# Altium PCB ee453_pcb_N-B-S.PcbDoc (part 1 of 2)
Units mil, origin at the board's own origin, x right, y up, seen from the top; angles counter-clockwise.
Board outline 6000 x 5000 mil, 4 copper layers (Power Layer, Signal layer, Ground layer, Extra signal layer), stack 53.912 mil thick; 97 components, 66 nets, 398 pads, 70 vias.
Unrouted connection lines stored in the file: 8.
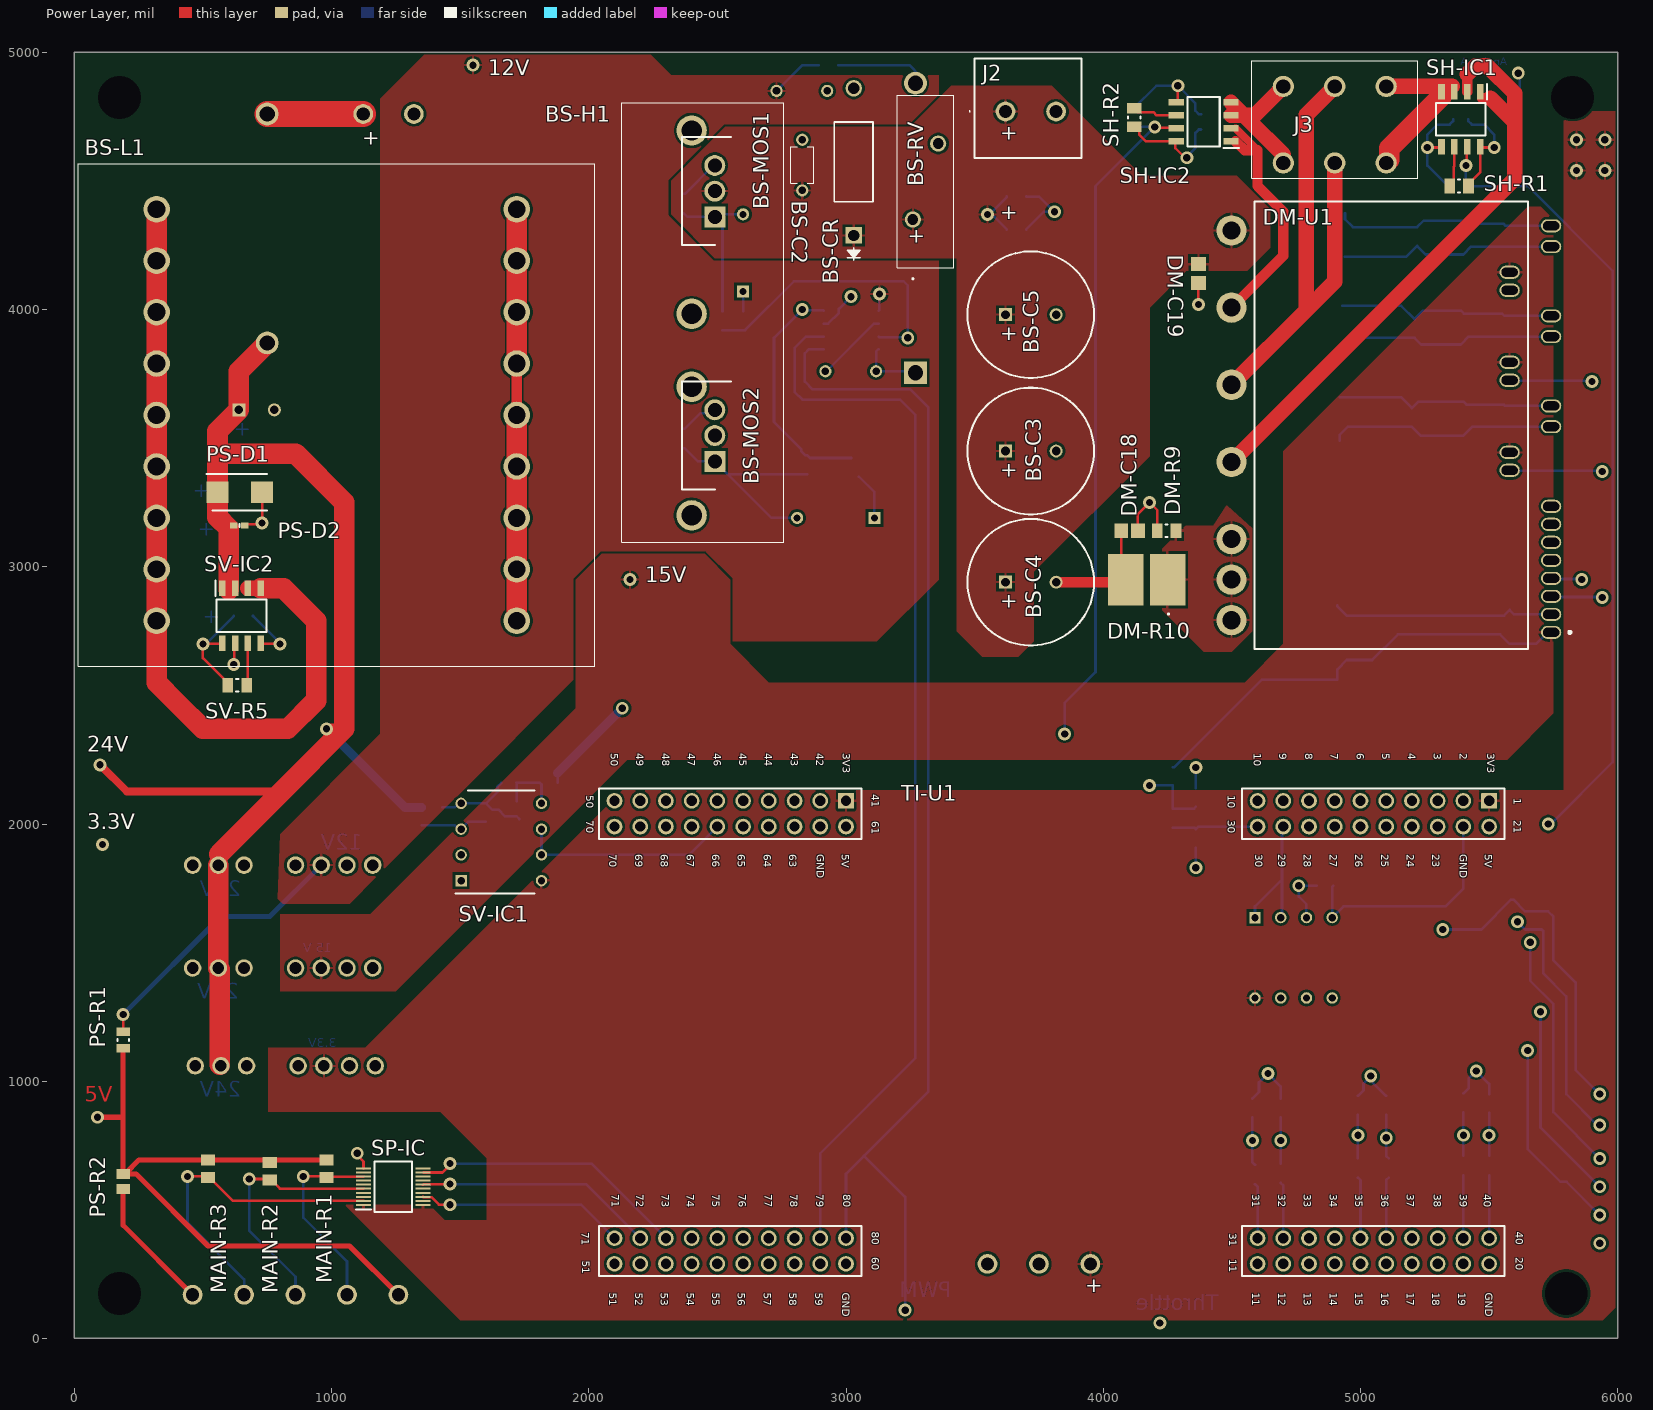
[diagram p0: Power Layer view]
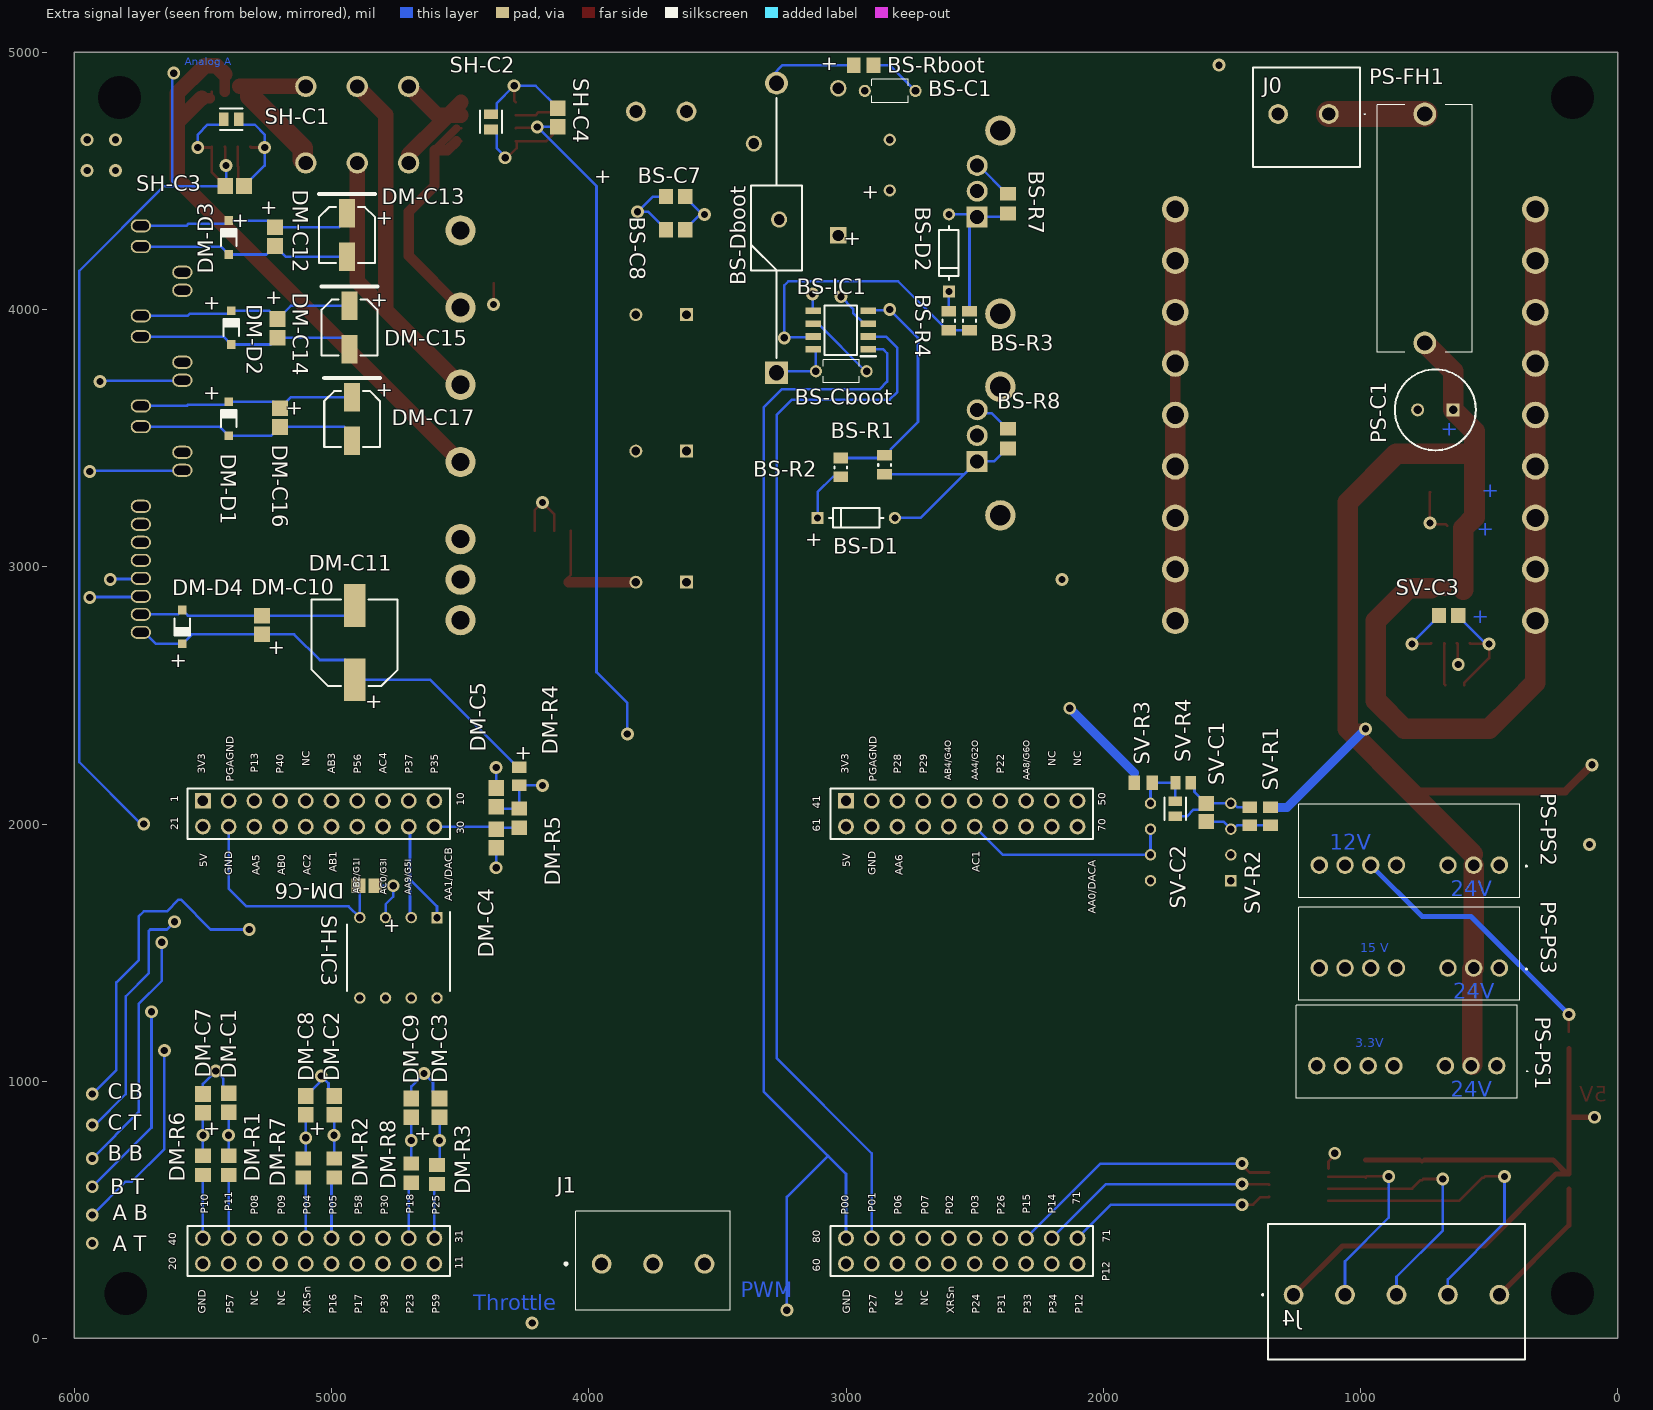
[diagram p1: Extra signal layer view, seen from below]
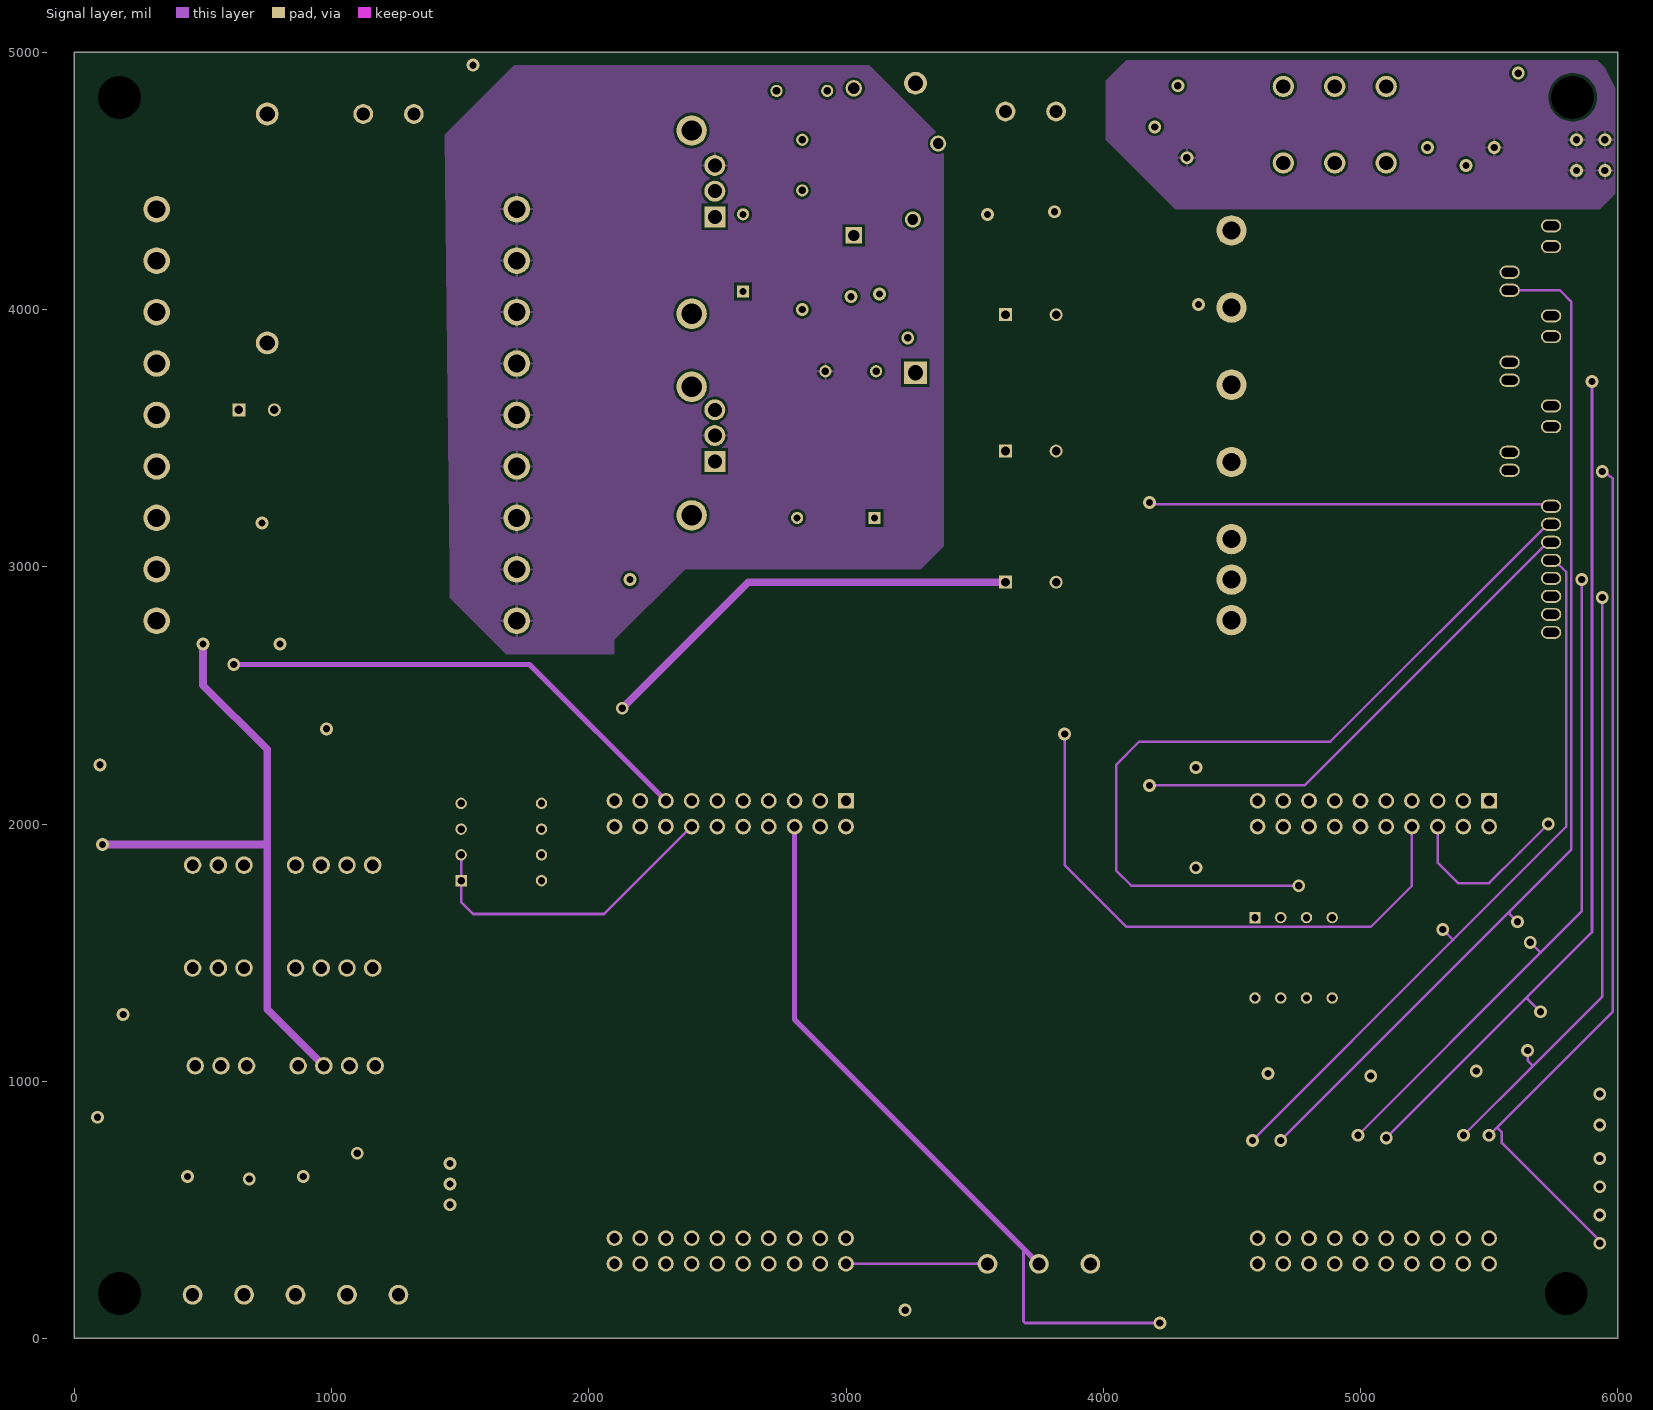
[diagram p2: Signal layer]
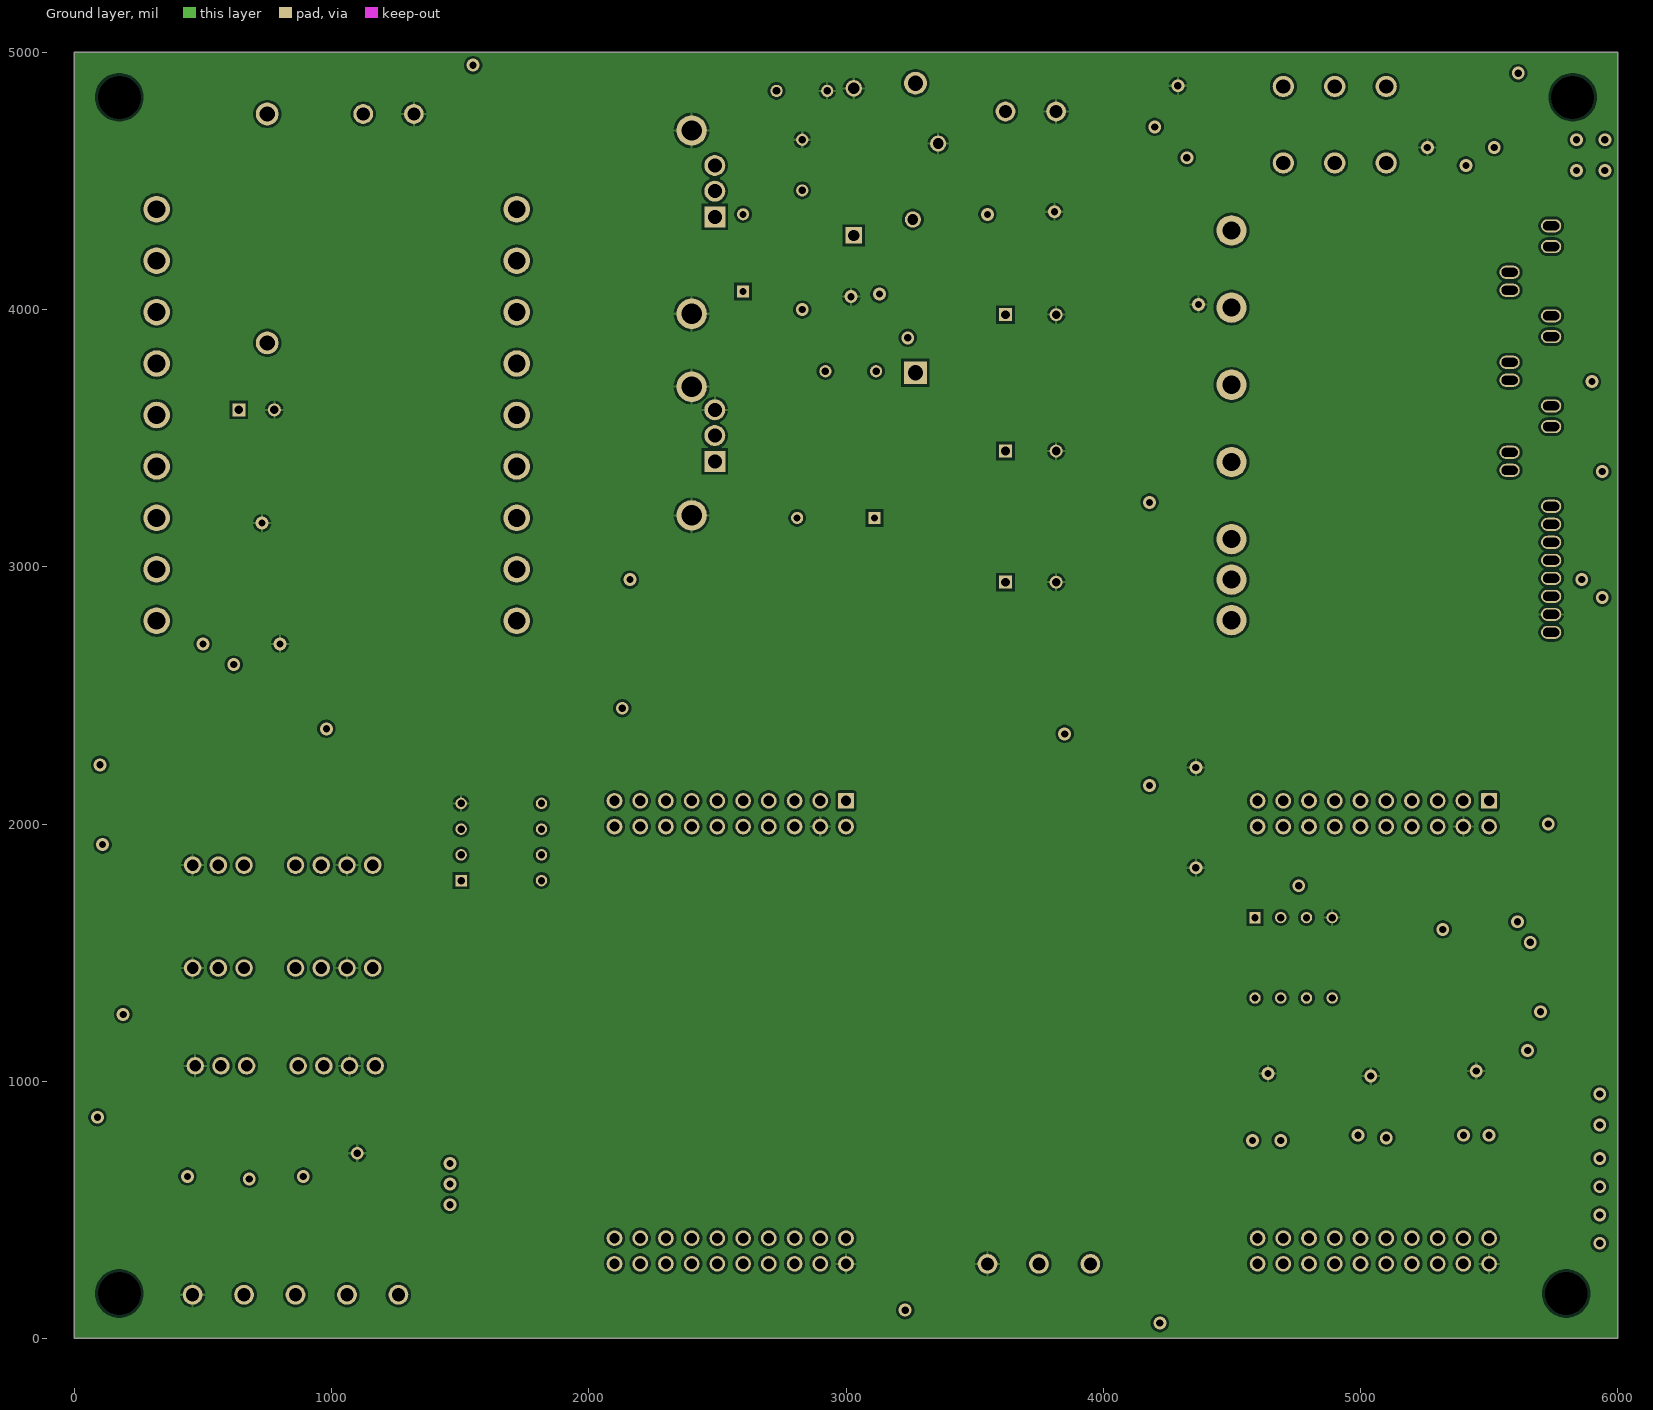
[diagram p3: Ground layer]

## Layer stack, top to bottom
Top Solder: solder mask 1, SM-001, Dk 4
Power Layer: signal copper 1.378
Dielectric 1: prepreg 5.1, PP-017, Dk 4.3
Dielectric 2: prepreg 5.1, PP-017, Dk 4.3
Signal layer: signal copper 1.378
Dielectric 3: core 28, Core-039, Dk 4.8
Ground layer: signal copper 1.378
Dielectric 4: prepreg 5.1, PP-017, Dk 4.3
Dielectric 5: prepreg 5.1, PP-017, Dk 4.3
Extra signal layer: signal copper 1.378
Bottom Solder: solder mask 1, SM-001, Dk 4

## Board outline
0,0 6000,0 6000,5000 0,5000

## Design rules (kind name [scope] priority, off if disabled: settings)
Clearance [All] p1: gap=5 ignorepadtopadclearanceinfootprint=FALSE except(0: SMDPad-Hole THPad-Hole Via-Hole Fill-Hole Poly-Hole Region-Hole Text-Hole; 10: THPad-THPad THPad-Via THPad-Fill THPad-Poly THPad-Region THPad-Text Via-Via Via-Fill Via-Poly Via-Region Via-Text Fill-Fill Fill-Poly Fill-Region Fill-Text Poly-Poly Poly-Region Poly-Text Region-Region Region-Text Text-Text)
Height [All] p1: minheight=0 maxheight=10000 prefheight=500
HoleSize [All] p1: absolutevalues=TRUE maxlimit=1000 minlimit=10 maxpercent=80.000 minpercent=20.000
MinimumSolderMaskSliver [All] p1: minsoldermaskwidth=5
PolygonConnect [All] p1: connectstyle=Relief reliefconductorwidth=10 reliefentries=4 polygonreliefangle="90 Angle" airgapwidth=10
RoutingVias [All] p1: holewidth=28 width=50 viastyle="Through Hole" minholewidth=28 minwidth=50 maxholewidth=1000 maxwidth=1000
SolderMaskExpansion [All] p1: expansion=4 istentingtop=FALSE
Width [All] p1: maxlimit=100 minlimit=10 preferedwidth=10
27 further rules are at their usual default settings.

## Classes and differential pairs
component class "TI Launchpad": TI-U1
component class PowerSupply: PS-C1 PS-D1 PS-D2 PS-FH1 PS-PS1 PS-PS2 PS-PS3 PS-R1 PS-R2
component class ee453_pcb_N-B-S: J0 J1 J2 J3 J4 MAIN-R1 MAIN-R2 MAIN-R3
component class "Drive Module": DM-C1 DM-C2 DM-C3 DM-C4 DM-C5 DM-C6 DM-C7 DM-C8 DM-C9 DM-C10 DM-C11 DM-C12 DM-C13 DM-C14 DM-C15 DM-C16 DM-C17 DM-C18 DM-C19 DM-D1 DM-D2 DM-D3 DM-D4 DM-R1 DM-R2 DM-R3 DM-R4 DM-R5 DM-R6 DM-R7 DM-R8 DM-R9 DM-R10 DM-U1
component class Designator: SH-C1 SH-C2 SH-C3 SH-C4 SH-IC1 SH-IC2 SH-IC3 SH-R1 SH-R2
component class "Boost Stage": 20 BS-C1 BS-C2 BS-C3 BS-C4 BS-C5 BS-C7 BS-C8 BS-Cboot BS-CR BS-D1 BS-D2 BS-Dboot BS-H1 BS-IC1 BS-IR2184 BS-L1 BS-MOS1 BS-MOS2 BS-R1 BS-R2 BS-R3 BS-R4 BS-R7 BS-R8 BS-Rboot BS-RV

## Components (designator, comment, footprint, x,y, rotation, side; value= is the part's Value field where it differs from the comment)
BS-C1 "K104K10X7RF5UH5" K104K10X7RF5UH5 2926.85,4850 r180 bottom
BS-C2 "K104K10X7RF5UH5" K104K10X7RF5UH5 2830,4660 r270 top
BS-C3 "EEUFS2A221" CAPPRD500W65D1250H2700 3620,3450 r0 top
BS-C4 "EEUFS2A221" CAPPRD500W65D1250H2700 3620,2940 r0 top
BS-C5 "EEUFS2A221" CAPPRD500W65D1250H2700 3620,3980 r0 top
BS-C7 "GRM21BR71H104KA01L" CAPC2013X135X45ML10T25 3662.6,4440 r180 bottom
BS-C8 "GRM21BR71H104KA01L" CAPC2013X135X45ML10T25 3662.6,4310 r180 bottom
BS-Cboot "K104K10X7RF5UH5" K104K10X7RF5UH5 2920,3760 r0 bottom
BS-CR "Part Number: P6KE91A" P6KESeries 3030,4860 r90 top value=Value
BS-D1 "1N4148" FP-017AG-MFG 2960.12,3190 r180 bottom
BS-D2 "1N4148" FP-017AG-MFG 2600,4220 r90 bottom
BS-Dboot "SB3H100-E3_54" DIOAD2855W132L835D505 3270,3754.02 r90 bottom
BS-H1 "WV-DT2-101E" WVDT2101E 2400,3200 r90 top
BS-IC1 "IRS2184SPBF" SOIC127P600X175-8N#1 3020,3920 r0 bottom
BS-L1 "B66366B1018T001" B66366B1018T001 1020,3590 r270 top
BS-MOS1 "IRFB4615PBF" TO254P483X1016X1994-3P 2490,4360 r90 top
BS-MOS2 "IRFB4615PBF" TO254P483X1016X1994-3P 2490,3410 r90 top
BS-R1 "CRCW08058R20JNEA" RESC2013X50X30NL20T20 2850,3396.42 r270 bottom
BS-R2 "CRCW080510R0FKEA" RESC2013X50X30NL20T20 3020,3386.42 r270 bottom
BS-R3 "CRCW08058R20JNEA" RESC2013X50X30NL20T20 2520,3956.42 r90 bottom
BS-R4 "CRCW080510R0FKEA" RESC2013X50X30NL20T20 2600,3956.42 r90 bottom
BS-R7 "ERJ-P06J103V" RESC2013X70X40ML20T20 2370,4411.61 r90 bottom
BS-R8 "ERJ-P06J103V" RESC2013X70X40ML20T20 2370,3498.39 r270 bottom
BS-Rboot "ERJ-P06J103V" RESC2013X70X40ML20T20 2931.61,4950 r180 bottom
BS-RV "V68ZS10P" V68ZS10P 3260,4350 r90 top
DM-C1 "08055C102KAT2A." CAPC2013X94X50ML20T25 5400,916.42 r270 bottom
DM-C2 "08055C102KAT2A." CAPC2013X94X50ML20T25 4990,906.42 r270 bottom
DM-C3 "08055C102KAT2A." CAPC2013X94X50ML20T25 4580,896.42 r270 bottom
DM-C4 "08055C102KAT2A." CAPC2013X94X50ML20T25 4360,1943.58 r90 bottom
DM-C5 "08055C102KAT2A." CAPC2013X94X50ML20T25 4360,2103.58 r270 bottom
DM-C6 "08055C103KAT-2A" CAPC2013X94X50NL20T25 4862.48,1760 r180 bottom
DM-C7 "08055C102KAT2A." CAPC2013X94X50ML20T25 5500,913.58 r270 bottom
DM-C8 "08055C102KAT2A." CAPC2013X94X50ML20T25 5100,906.42 r270 bottom
DM-C9 "08055C102KAT2A." CAPC2013X94X50ML20T25 4690,896.42 r270 bottom
DM-C10 "08051C104JAT2A" CAPC2013X94X50ML20T25 5270,2773.58 r270 bottom
DM-C11 "EEE-FK1E221P" PNSC-EEE-FK1E221P_N 4910,2704.68 r90 bottom
DM-C12 "08051C104JAT2A" CAPC2013X94X50ML20T25 5220,4283.58 r90 bottom
DM-C13 "EEEFP1E220AR" PNSC-FP-V-C_V 4940,4290 r270 bottom
DM-C14 "08051C104JAT2A" CAPC2013X94X50ML20T25 5210,3926.42 r90 bottom
DM-C15 "EEEFP1E220AR" PNSC-FP-V-C_V 4930,3930 r270 bottom
DM-C16 "08051C104JAT2A" CAPC2013X94X50ML20T25 5200,3580 r90 bottom
DM-C17 "EEEFP1E220AR" PNSC-FP-V-C_V 4920,3574.65 r270 bottom
DM-C18 "08055C103KAT-2A" CAPC2013X94X50NL20T25 4102.48,3140 r0 top
DM-C19 "GRM21BR71H104KA01L" CAPC2013X135X45ML10T25 4370,4140 r270 top
DM-D1 "MMSZ5245B-E3-08" VISH-SOD-123-2_V 5400,3575.94 r90 bottom
DM-D2 "MMSZ5245B-E3-08" VISH-SOD-123-2_V 5390,3930 r90 bottom
DM-D3 "MMSZ5245B-E3-08" VISH-SOD-123-2_V 5400,4280 r90 bottom
DM-D4 "MMSZ5245B-E3-08" VISH-SOD-123-2_V 5580,2765.94 r270 bottom
DM-R1 "ERA6AEB101V" RESC2013X60X40ML20T25 5400,672.6 r90 bottom
DM-R2 "ERA6AEB101V" RESC2013X60X40ML20T25 4990,662.6 r90 bottom
DM-R3 "ERA6AEB101V" RESC2013X60X40ML20T25 4590,637.4 r90 bottom
DM-R4 "ERJ-6ENF4701V" RESC2013X70X40NL20T20 4270,2185.55 r270 bottom
DM-R5 "ERA6AEB101V" RESC2013X60X40ML20T25 4270,2022.6 r90 bottom
DM-R6 "ERA6AEB101V" RESC2013X60X40ML20T25 5500,672.6 r90 bottom
DM-R7 "ERA6AEB101V" RESC2013X60X40ML20T25 5110,662.6 r90 bottom
DM-R8 "ERA6AEB101V" RESC2013X60X40ML20T25 4690,642.6 r90 bottom
DM-R9 "CRCW0805200RFKEA" RESC2013X50X30NL20T20 4246.42,3140 r180 top
DM-R10 "WSHM2818R0330FEB" WSHM2818R0330FEB 4169.09,2950 r180 top
DM-U1 "FNB34060T" FNB34060T 5120,3550 r270 top
J0 "1985881" 1985881 1123.15,4760 r0 bottom
J1 "1985917" 1985917 3950,290 r180 bottom
J2 "1985881" 1985881 3620,4770 r0 top
J3 "1730515" 1730515 5100,4867.24 r180 top
J4 "1733606" 1733606 1260,170 r180 bottom
MAIN-R1 "CRCW080510K0FKEAHP" RESC2013X60X40NL15T20 980,660 r90 top
MAIN-R2 "CRCW080510K0FKEAHP" RESC2013X60X40NL15T20 760,650 r90 top
MAIN-R3 "CRCW080510K0FKEAHP" RESC2013X60X40NL15T20 520,660 r90 top
PS-C1 "EEU-FS2A470" CAPPRD350W65D800H1650 640,3610 r0 bottom
PS-D1 "SMBJ28A" DIOM5436X261N 643.39,3290 r0 top
PS-D2 "EZA-EG2A50AX" DIONC1005X43N 641.65,3160 r0 top
PS-FH1 "0PTF0078P" 0PTF0078P 750,4315.12 r270 bottom
PS-PS1 "RS3-243.3S" RS32433S 470,1060 r0 bottom
PS-PS2 "RS3-2412S" RS32415S 460,1840 r0 bottom
PS-PS3 "RS3-2415S" RS32415S 460,1440 r0 bottom
PS-R1 "CRCW0805210KFKEA" RESC2013X50X30LL20T20 190,1160 r90 top
PS-R2 "ERA6AEB154V" RESC2013X60X40LL20T25 190,610 r90 top
SH-C1 "C0805C104K5RACTU" FP-C0805C-DN-MFG 5389.53,4740 r180 bottom value="0.10 μF"
SH-C2 "C0805C104K5RACTU" FP-C0805C-DN-MFG 4380,4729.53 r90 bottom value="0.10 μF"
SH-C3 "08055C102KAT2A." CAPC2013X94X50ML20T25 5376.42,4480 r0 bottom
SH-C4 "08055C102KAT2A." CAPC2013X94X50ML20T25 4120,4746.42 r270 bottom
SH-IC1 "ACS711ELCTR-12AB-T" SOIC127P600X175-8N#1 5390,4740 r270 top
SH-IC2 "ACS711ELCTR-12AB-T" SOIC127P600X175-8N#1 4390,4730 r180 top
SH-IC3 "LMC6482IN_NOPB" DIP794W53P254L959H508Q8N#1 4740,1480 r270 bottom
SH-R1 "CRCW08051K00FKEA" RESC2013X50X30NL20T20 5383.58,4480 r180 top
SH-R2 "CRCW08051K00FKEA" RESC2013X50X30NL20T20 4120,4746.42 r90 top
SP-IC "SN74LVC245ADGVR" SOP40P640X120-20N 1240,590 r0 top
SV-C1 "08052A151JAT2A" CAPC2013X140X50ML20T25 1600,2044.57 r270 bottom
SV-C2 "C0805C101J1GACTU" FP-C0805C-DN-MFG 1720,2059.53 r270 bottom value="100 pF"
SV-C3 "GRM21BR71H104KA01L" CAPC2013X135X45ML10T25 657.4,2810 r180 bottom
SV-IC1 "LMC6482IN_NOPB" DIP794W53P254L959H508Q8N#2 1660,1930 r0 top
SV-IC2 "ACS711ELCTR-12AB-T" SOIC127P600X175-8N#2 650,2810 r270 top
SV-R1 "ERJ-6ENF2103V" RESC2013X70X40NL20T20 1350,2030 r90 bottom
SV-R2 "ERJ-6ENF2612V" RESC2013X70X40NL20T20 1430,2030 r270 bottom
SV-R3 "ERJ-6ENF3093V" RESC2013X70X40NL20T20 1844.45,2160 r0 bottom
SV-R4 "ERA6AEB183V" RESC2013X60X40LL20T25 1689.53,2160 r0 bottom
SV-R5 "CRCW08051K00FKEA" RESC2013X50X30NL20T20 633.58,2540 r180 top
TI-U1 "C2000" C2000 3800,1190 r0 top

## Footprints (in the part's own frame and the unit in brackets; to place one, negate y for a bottom-side part, rotate by r counter-clockwise, add the part's x,y. Pads: shape width x height; smd on the part's side, far side on the other; paste and mask are expansions set on the pad)
0PTF0078P [mm]
  round 2.25 hole 1.5: 1(-11.3,0) 2(11.3,0)
  silkscreen extent -12.2,-4.7 12.2,4.7, body extent -12.2,-4.7 12.2,4.7, height 11.6
1730515 [mm]
  round 2.1 hole 1.4: 1(0,0) 2(0,7.55) 3(5.08,0) 4(5.08,7.55) 5(10.16,0) 6(10.16,7.55)
  silkscreen extent -3.13,-2.55 13.29,9.07, body extent -3.13,-2.55 13.29,9.07, height 18.1
1733606 [mm]
  round 1.95 hole 1.3: 1(0,0) 2(5.08,0) 3(10.16,0) 4(15.24,0) 5(20.32,0)
  silkscreen extent -3.1,-6.4 22.86,7, body extent -2.54,-7 22.86,6.4, height 15.55
1985881 [mm]
  round 1.95 hole 1.3: 1(0,0) 2(5,0)
  silkscreen extent -3.6,-4.6 7.5,5.25, body extent -3.07,-4.6 7.5,5.25, height 14
1985917 [mm]
  round 1.95 hole 1.3: 1(0,0) 2(5.08,0) 3(10.16,0)
  silkscreen extent -3.62,-4.6 12.7,5.2, body extent -2.54,-4.6 12.7,5.2, height 14.05
B66366B1018T001 [mm]
  round 2.625 hole 1.75: 1(-20.32,-17.78) 2(-15.24,-17.78) 3(-10.16,-17.78) 4(-5.08,-17.78) 5(0,-17.78) 6(5.08,-17.78) 7(10.16,-17.78) 8(15.24,-17.78) 9(20.32,-17.78) 10(20.32,17.78) 11(15.24,17.78) 12(10.16,17.78) 13(5.08,17.78) 14(0,17.78) 15(-5.08,17.78) 16(-10.16,17.78) 17(-15.24,17.78) 18(-20.32,17.78)
  silkscreen extent -24.8,-25.5 24.8,25.5, body extent -24.8,-25.5 24.8,25.5, height 38.5
C2000 [mm]
  rrect6% 1.55x1.55 hole 1.02: 1(43.18,22.86) 41(-20.32,22.86)
  round 1.55 hole 1.02: 2(40.64,22.86) 3(38.1,22.86) 4(35.56,22.86) 5(33.02,22.86) 6(30.48,22.86) 7(27.94,22.86) 8(25.4,22.86) 9(22.86,22.86) 10(20.32,22.86) 11(20.32,-22.86) 12(22.86,-22.86) 13(25.4,-22.86) 14(27.94,-22.86) 15(30.48,-22.86) 16(33.02,-22.86) 17(35.56,-22.86) 18(38.1,-22.86) 19(40.64,-22.86) 20(43.18,-22.86) 21(43.18,20.32) 22(40.64,20.32) 23(38.1,20.32) 24(35.56,20.32) 25(33.02,20.32) 26(30.48,20.32) 27(27.94,20.32) 28(25.4,20.32) 29(22.86,20.32) 30(20.32,20.32) 31(20.32,-20.32) 32(22.86,-20.32) 33(25.4,-20.32) 34(27.94,-20.32) 35(30.48,-20.32) 36(33.02,-20.32) 37(35.56,-20.32) 38(38.1,-20.32) 39(40.64,-20.32) 40(43.18,-20.32) 42(-22.86,22.86) 43(-25.4,22.86) 44(-27.94,22.86) 45(-30.48,22.86) 46(-33.02,22.86) 47(-35.56,22.86) 48(-38.1,22.86) 49(-40.64,22.86) 50(-43.18,22.86) 51(-43.18,-22.86) 52(-40.64,-22.86) 53(-38.1,-22.86) 54(-35.56,-22.86) 55(-33.02,-22.86) 56(-30.48,-22.86) 57(-27.94,-22.86) 58(-25.4,-22.86) 59(-22.86,-22.86) 60(-20.32,-22.86) 61(-20.32,20.32) 62(-22.86,20.32) 63(-25.4,20.32) 64(-27.94,20.32) 65(-30.48,20.32) 66(-33.02,20.32) 67(-35.56,20.32) 68(-38.1,20.32) 69(-40.64,20.32) 70(-43.18,20.32) 71(-43.18,-20.32) 72(-40.64,-20.32) 73(-38.1,-20.32) 74(-35.56,-20.32) 75(-33.02,-20.32) 76(-30.48,-20.32) 77(-27.94,-20.32) 78(-25.4,-20.32) 79(-22.86,-20.32) 80(-20.32,-20.32)
  silkscreen extent -44.7,-24.07 44.7,24.07, body extent -44.7,-24.07 44.7,24.07, height 8.51
CAPC2013X94X50ML20T25 [mm] "Chip Capacitor, 2-Leads, Body 2.01x1.25mm, IPC Low Density"
  rect 1.55x1.55 smd: 1(-0.925,0) 2(0.925,0)
  body extent -1.1,-0.72 1.11,0.72, height 0.94
CAPC2013X94X50NL20T25 [mm] "Chip Capacitor, 2-Leads, Body 2.01x1.25mm, IPC Medium Density"
  rect 1.35x1.45 smd: 1(-0.825,0) 2(0.825,0)
  body extent -1.1,-0.72 1.11,0.72, height 0.94
CAPC2013X135X45ML10T25 [mm] "Chip Capacitor, 2-Leads, Body 2.10x1.35mm, IPC Low Density"
  rect 1.4x1.5 smd: 1(-0.95,0) 2(0.95,0)
  body extent -1.05,-0.67 1.05,0.67, height 1.35
CAPC2013X140X50ML20T25 [mm] "Chip Capacitor, 2-Leads, Body 2.00x1.25mm, IPC Low Density"
  rect 1.5x1.55 smd: 1(-0.9,0) 2(0.9,0)
  body extent -1.1,-0.72 1.1,0.72, height 1.4
CAPPRD350W65D800H1650 [mm]
  rect 1.275x1.275 hole 0.85: 1(0,0)
  round 1.275 hole 0.85: 2(3.5,0)
  silkscreen extent -2.25,-4 5.75,4, body extent -2.5,-4.25 6,4.25, height 16.5
CAPPRD500W65D1250H2700 [mm]
  rect 1.275x1.275 hole 0.85: 1(0,0)
  round 1.275 hole 0.85: 2(5,0)
  silkscreen extent -3.75,-6.25 8.75,6.25, body extent -4,-6.5 9,6.5, height 27
DIOAD2855W132L835D505 [mm]
  rect 2.25x2.25 hole 1.5: 1(0,0)
  round 2.25 hole 1.5: 2(28.6,0)
  silkscreen extent 1.48,-2.52 27.13,2.52, body extent -0.65,-2.65 29.21,2.65, height 5.3
DIOM5436X261N [mm]
  rect 2.2x2.15 smd: 1(-2.2,0) 2(2.2,0)
  silkscreen extent -3.27,-1.81 2.7,1.81, body extent -2.7,-1.81 2.7,1.81, height 2.61
DIONC1005X43N [mm]
  rect 0.75x0.6 smd: 1(-0.55,0) 2(0.55,0)
  silkscreen extent 0,-0.15 0,0.15, body extent -0.5,-0.25 0.5,0.25, height 0.43
DIP794W53P254L959H508Q8N#1 [mm]
  rect 1.13x1.13 hole 0.73: 1(-3.97,3.81)
  round 1.13 hole 0.73: 2(-3.97,1.27) 3(-3.97,-1.27) 4(-3.97,-3.81) 5(3.97,-3.81) 6(3.97,-1.27) 7(3.97,1.27) 8(3.97,3.81)
  silkscreen extent -4.53,-5.08 3.3,5.08, body extent -4.1,-4.8 4.1,4.79, height 5.08
DIP794W53P254L959H508Q8N#2 [mm]
  rect 1.13x1.13 hole 0.73: 1(-3.97,-3.81)
  round 1.13 hole 0.73: 2(-3.97,-1.27) 3(-3.97,1.27) 4(-3.97,3.81) 5(3.97,3.81) 6(3.97,1.27) 7(3.97,-1.27) 8(3.97,-3.81)
  silkscreen extent -4.53,-5.08 3.3,5.08, body extent -4.1,-4.8 4.1,4.8, height 5.08
FNB34060T [mm]
  oval 1.3x2 hole 1.6 slot 0.9 at 0 deg paste-1000 mask+0: 1(20.447,15.78) 2(18.669,15.78) 3(16.891,15.78) 4(15.113,15.78) 5(13.335,15.78) 6(11.557,15.78) 7(9.779,15.78) 8(8.001,15.78) 9(4.445,11.68) 10(2.667,11.68) 11(0.136,15.78) 12(-1.914,15.78) 13(-4.445,11.68) 14(-6.223,11.68) 15(-8.754,15.78) 16(-10.804,15.78) 17(-13.335,11.68) 18(-15.113,11.68) 19(-17.644,15.78) 20(-19.694,15.78)
  round 3 hole 1.8 paste-1000 mask+0: 21(19.24,-15.78) 22(15.24,-15.78) 23(11.24,-15.78) 24(3.62,-15.78) 25(-4,-15.78) 26(-11.62,-15.78) 27(-19.24,-15.78)
  silkscreen extent -22.1,-13.5 22.1,17.76, body extent -21.96,-16.1 21.97,16.38, height 5.61
FP-017AG-MFG [mm]
  rect 1.2x1.2 hole 0.7 paste-1000 mask+0: 1(-3.813,0)
  round 1.2 hole 0.7 paste-1000 mask+0: 2(3.813,0)
  silkscreen extent -2.68,-0.95 2.68,0.95, body extent -4.06,-0.95 4.06,0.95, height 1.91
FP-C0805C-DN-MFG [mm]
  rect 0.95x1.35 smd paste+0 mask+0: 1(-0.75,0) 2(0.75,0)
  silkscreen extent -1.1,-1.07 1.1,1.07, body extent -1,-0.63 1,0.62, height 0.88
K104K10X7RF5UH5 [mm]
  round 1.2 hole 0.75: 1(0,0) 2(5,0)
  silkscreen extent 0.7,-1.15 4.3,1.15, body extent -0.27,-1.15 5.28,1.15, height 6.3
P6KESeries [mil]
  rect 64x64 hole 44: 1(-572,0)
  round 64 hole 44: 2(0,0)
  silkscreen extent -669,-75 -131,75, body extent 0,0 10,10, height 10
PNSC-EEE-FK1E221P_N [mm] "CAPAE, 2-Leads, Body 8.5x8.5mm, IPC Medium Density"
  rect 4.2x2.1 smd: 1(-3.675,0) 2(3.675,0)
  silkscreen extent -4.25,-4.25 4.25,4.25, body extent -5,-4.25 5,4.25, height 10.5
PNSC-FP-V-C_V [mm] "CAPAE, 2-Leads, Body 5.50x5.50mm"
  rect 2.8x1.6 smd: 1(-2.15,0) 2(2.15,0)
  silkscreen extent -4.05,-2.75 2.75,2.75, body extent -3.25,-2.75 3.25,2.75, height 6.1
RESC2013X50X30LL20T20 [mm] "Chip Resistor, 2-Leads, Body 2.00x1.25mm, IPC High Density"
  rect 0.85x1.35 smd: 1(-0.825,0) 2(0.825,0)
  silkscreen extent -0.1,-0.58 0.1,0.58, body extent -1.1,-0.72 1.1,0.72, height 0.5
RESC2013X50X30NL20T20 [mm] "Chip Resistor, 2-Leads, Body 2.00x1.25mm, IPC Medium Density"
  rect 1.05x1.45 smd: 1(-0.925,0) 2(0.925,0)
  silkscreen extent -0.1,-0.63 0.1,0.63, body extent -1.1,-0.72 1.1,0.72, height 0.5
RESC2013X60X40LL20T25 [mm] "Chip Resistor, 2-Leads, Body 2.00x1.25mm, IPC High Density"
  rect 1x1.35 smd: 1(-0.75,0) 2(0.75,0)
  body extent -1.1,-0.72 1.1,0.72, height 0.6
RESC2013X60X40ML20T25 [mm] "Chip Resistor, 2-Leads, Body 2.00x1.25mm, IPC Low Density"
  rect 1.4x1.55 smd: 1(-0.95,0) 2(0.95,0)
  body extent -1.1,-0.72 1.1,0.72, height 0.6
RESC2013X60X40NL15T20 [mm] "Chip Resistor, 2-Leads, Body 2.00x1.25mm, IPC Medium Density"
  rect 1.1x1.4 smd: 1(-0.875,0) 2(0.875,0)
  body extent -1.07,-0.7 1.08,0.7, height 0.6
RESC2013X70X40ML20T20 [mm] "Chip Resistor, 2-Leads, Body 2.00x1.25mm, IPC Low Density"
  rect 1.35x1.55 smd: 1(-0.975,0) 2(0.975,0)
  body extent -1.1,-0.72 1.1,0.72, height 0.7
RESC2013X70X40NL20T20 [mm] "Chip Resistor, 2-Leads, Body 2.2x1.35mm, IPC Medium Density"
  rect 1.15x1.45 smd: 1(-0.875,0) 2(0.875,0)
  body extent -1.1,-0.72 1.1,0.72, height 0.7
RS32415S [mm]
  round 1.725 hole 1.15: 1(0,0) 2(2.54,0) 3(5.08,0) 5(10.16,0) 6(12.7,0) 7(15.24,0) 8(17.78,0)
  silkscreen extent -2.71,-6 19.79,3.2, body extent -2.01,-6 19.79,3.2, height 11.45
RS32433S [mm]
  round 1.725 hole 1.15: 1(0,0) 2(2.54,0) 3(5.08,0) 5(10.16,0) 6(12.7,0) 7(15.24,0) 8(17.78,0)
  silkscreen extent -3.05,-6 19.79,3.2, body extent -2.03,-5.87 19.77,3.33, height 10.61
SOIC127P600X175-8N#1 [mm]
  rect 1.525x0.65 smd: 1(-2.712,1.905) 2(-2.712,0.635) 3(-2.712,-0.635) 4(-2.712,-1.905) 5(2.712,-1.905) 6(2.712,-0.635) 7(2.712,0.635) 8(2.712,1.905)
  silkscreen extent -3.47,-2.45 1.6,2.58, body extent -3,-2.45 3,2.45, height 1.75
SOIC127P600X175-8N#2 [mm]
  rect 1.525x0.65 smd: 1(-2.712,-1.905) 2(-2.712,-0.635) 3(-2.712,0.635) 4(-2.712,1.905) 5(2.712,1.905) 6(2.712,0.635) 7(2.712,-0.635) 8(2.712,-1.905)
  silkscreen extent -3.47,-2.58 1.6,2.45, body extent -3,-2.45 3,2.45, height 1.75
SOP40P640X120-20N [mm]
  rect 1.475x0.2 smd: 1(-2.938,-1.8) 2(-2.938,-1.4) 3(-2.938,-1) 4(-2.938,-0.6) 5(-2.938,-0.2) 6(-2.938,0.2) 7(-2.938,0.6) 8(-2.938,1) 9(-2.938,1.4) 10(-2.938,1.8) 11(2.938,1.8) 12(2.938,1.4) 13(2.938,1) 14(2.938,0.6) 15(2.938,0.2) 16(2.938,-0.2) 17(2.938,-0.6) 18(2.938,-1) 19(2.938,-1.4) 20(2.938,-1.8)
  silkscreen extent -3.67,-2.5 1.85,2.5, body extent -3.2,-2.5 3.2,2.5, height 1.2
TO254P483X1016X1994-3P [mm]
  rect 2.07x2.07 hole 1.38: 1(0,0)
  round 2.07 hole 1.38: 2(2.54,0) 3(5.08,0)
  silkscreen extent -2.8,-1.61 7.88,3.22, body extent -2.54,-1.61 7.62,3.22, height 18.86
V68ZS10P [mm]
  round 1.59 hole 1.06: 1(0,0) 2(7.5,-2.5)
  silkscreen extent -5.9,-4.05 12.25,1.55, body extent -4.75,-4.05 12.25,1.55, height 20.1
VISH-SOD-123-2_V [mm] "SMD, 2-Leads, Body 2.7x1.55mm, Height 1.35mm"
  rect 0.85x0.85 smd: 1(-1.675,0) 2(1.675,0)
  silkscreen extent -0.85,-0.77 0.85,0.78, body extent -1.35,-0.77 1.35,0.77, height 1.35
WSHM2818R0330FEB [mm]
  rect 3.5x5.1 smd: 1(-2.055,0) 2(2.055,0)
  silkscreen extent -2.2,3.35 -2.1,3.45, body extent -3.55,0 3.55,4.6, height 1.35
WVDT2101E [mm]
  round 3 hole 2: 1(0,0) 2(12.7,0) 3(19.9,0) 4(38,0)
  silkscreen extent -2.65,-9.11 40.75,6.89, body extent -2.65,-9.11 40.75,6.89, height 32.4

## Part data
BS-C1 BS-C2 BS-Cboot: "Capacitor", Manufacturer_Name=Vishay, Mouser Part Number=594-K104K10X7RF5UH5, Arrow Part Number=K104K10X7RF5UH5, Arrow Price/Stock=https://www.arrow.com/en/products/k104k10x7rf5uh5/vishay, Datasheet Link=https://www.vishay.com/docs/45171/kseries.pdf, Height=6.2mm, Manufacturer_Part_Number=K104K10X7RF5UH5, Mouser Price/Stock=https://www.mouser.co.uk/ProductDetail/Vishay-BC-Components/K104K10X7RF5UH5?qs=rLgk8CAOBHbAqIwDswVbzA%3D%3D
BS-C3 BS-C4 BS-C5: "Capacitor Polarised", Manufacturer_Name=Panasonic, Datasheet Link=https://industrial.panasonic.com/cdbs/www-data/pdf/RDF0000/ABA0000C1255.pdf, Height=27mm, Manufacturer_Part_Number=EEUFS2A221
BS-C7 BS-C8 DM-C19 SV-C3: library part CMP-2100-03644-1, "Chip Capacitor, 0.1 uF, +/- 10%, 50 V, -55 to 125 degC, 0805 (2012 Metric), RoHS, Tape and Reel", Capacitance=100nF, Case Code (Imperial)=0805, Case Code (Metric)=2012, Dielectric=X7R, Dielectric Material=Ceramic, Insulation Resistance=10GR, Manufacturer=Murata, Max Operating Temperature=125degC, Min Operating Temperature=-55degC, Package Description="2-Pin Surface Mount Device, Body 2 x 1.25 mm", Package Quantity=1, Tolerance=10%, Voltage=50V, Case/Package=0805, Datasheet URL=http://psearch.en.murata.com/capacitor/product/GRM21BR71H104KA01%23.pdf, Datasheet Version=42675.0, Depth=1.25mm, Height=1.25mm, Lead Free=LeadFree, Length=2mm, Manufacturer URL=http://www.murata.com/, Material=Ceramic, Mount=SurfaceMount, Number of Pins=2, Package Reference=0805, Packaging=TapeandReel, Radiation Hardening=No, REACH SVHC=Unknown, RoHSCompliant=true, Termination=SMD/SMT, Thickness=0.053inch, Voltage Rating=50V, Voltage Rating (DC)=50V, Width=0.049inch
BS-CR: library part P6KE91A, "No Description Available", Built_By=EMA_UL_Team, Copyright="Copyright (C) 2018 Accelerated Designs. All rights reserved", Manufacturer_Part_Number=P6KE91A, RefDes=RefDes, Type=DEV, Vendor="Littelfuse Inc"
BS-D1 BS-D2: library part CMP-07163-000046-1, "DIODE GEN PURP 100V 200MA DO35", Average Rectified Current=200mA, Capacitance=4pF, Case/Package=DO-35, Current=4A, Forward Current=300mA, Forward Voltage=1V, Max Forward Surge Current (Ifsm)=1A, Max Operating Temperature=175°C, Max Power Dissipation=500mW, Max Repetitive Reverse Voltage (Vrrm)=100V, Max Reverse Current=5uA, Min Operating Temperature=-65°C, Package Quantity=2000, Contact Plating=Tin, Current Rating=200mA, Diameter=1.91mm, Element Configuration=Single, Height=4.56mm, Lead Free="Lead Free", Length=4.56mm, Max Reverse Voltage (DC)=100V, Max Surge Current=4A, Mount="Through Hole", Number of Pins=2, Output Current=200mA, Outside Diameter=1.85mm, Packaging=Bulk, Peak Non-Repetitive Surge Current=4A, Polarity=Standard, Power Dissipation=500mW, Radiation Hardening=No, REACH SVHC="No SVHC", Recovery Time=4ns, Reverse Recovery Time=4ns, Reverse Voltage=100V, Series=-, Voltage=100V, Voltage Rating (DC)=100V, Weight=0.01lb, Width=1.91mm
BS-Dboot: "Schottky Diode", Manufacturer_Name=Vishay, Manufacturer_Part_Number=SB3H100-E3/54, Mouser Part Number=625-SB3H100-E3, Datasheet Link=http://www.vishay.com/docs/88720/sb3h90.pdf, Mouser Price/Stock=https://www.mouser.com/Search/Refine.aspx?Keyword=625-SB3H100-E3
BS-H1: "Power MOSFET heat sink", Manufacturer_Name=Ohmite, Mouser Part Number=588-WV-DT2-101E, Datasheet Link=https://componentsearchengine.com/Datasheets/1/WV-DT2-101E.pdf, Height=32.3mm, Manufacturer_Part_Number=WV-DT2-101E, Mouser Price/Stock=https://www.mouser.com/Search/Refine.aspx?Keyword=588-WV-DT2-101E
BS-IC1: "Integrated Circuit", Manufacturer_Name=Infineon, Mouser Part Number=942-IRS2184SPBF, Arrow Part Number=IRS2184SPBF, Arrow Price/Stock=https://www.arrow.com/en/products/irs2184spbf/infineon-technologies-ag, Datasheet Link=https://www.infineon.com/dgdl/irs2184.pdf?fileId=5546d462533600a401535676d8da27db, Height=1.75mm, Manufacturer_Part_Number=IRS2184SPBF, Mouser Price/Stock=https://www.mouser.co.uk/ProductDetail/Infineon-IR/IRS2184SPBF?qs=dQmlx5f5cRJ1KO8jS8%252BNRA%3D%3D
BS-L1: "Undefined or Miscellaneous", Manufacturer_Name=TDK, Mouser Part Number=N/A, Arrow Part Number=B66366B1018T001, Arrow Price/Stock=http://www.arrow.com/en/products/b66366b1018t001/epcos-tdk, Datasheet Link=http://uk.rs-online.com/web/p/products/1620179, Height=38.4mm, Manufacturer_Part_Number=B66366B1018T001, Mouser Price/Stock=https://www.mouser.co.uk/ProductDetail/EPCOS-TDK/B66366B1018T001?qs=w5o0Loj0u7MIqxMJwOyApA%3D%3D
BS-MOS1 BS-MOS2: "MOSFET (N-Channel)", Manufacturer_Name=Infineon, Mouser Part Number=942-IRFB4615PBF, Arrow Part Number=IRFB4615PBF, Arrow Price/Stock=https://www.arrow.com/en/products/irfb4615pbf/infineon-technologies-ag, Datasheet Link=https://static6.arrow.com/aropdfconversion/fc085eb00e813bec65c58b34c53aeea1d8b02a1f/irfb4615pbf.pdf, Height=4.83mm, Manufacturer_Part_Number=IRFB4615PBF, Mouser Price/Stock=https://www.mouser.co.uk/ProductDetail/Infineon-Technologies/IRFB4615PBF?qs=9%252BKlkBgLFf20BbweusQYXA%3D%3D
BS-R1 BS-R3: library part CMP-2001-04157-1, Manufacturer="Vishay Dale", Part Number=CRCW08058R20JNEA
BS-R2 BS-R4: library part CMP-2001-04915-1, Manufacturer="Vishay Dale", Part Number=CRCW080510R0FKEA
BS-R7 BS-R8 BS-Rboot: library part CMP-2001-00478-1, Manufacturer=Panasonic, Part Number=ERJ-P06J103V
BS-RV: "Varistor", Manufacturer_Name=LITTELFUSE, Mouser Part Number=576-V68ZS10P, Datasheet Link=http://www.littelfuse.com/~/media/electronics/datasheets/varistors/littelfuse_varistor_za_datasheet.pdf.pdf, Height=20mm, Manufacturer_Part_Number=V68ZS10P, Mouser Price/Stock=https://www.mouser.co.uk/ProductDetail/Littelfuse/V68ZS10P?qs=1%2FWRN91BpNvIRlTsONWDiQ%3D%3D
DM-C1 DM-C2 DM-C3 DM-C4 DM-C5 DM-C7 DM-C8 DM-C9: library part CMP-1036-02979-2, "1 nF cap", Manufacturer="AVX Interconnect / Elco", Part Number=08055C102KAT2A.
DM-C6 DM-C18: library part CMP-2007-04363-1, "10 nF cap", Manufacturer="AVX Interconnect / Elco", Part Number=08055C103KAT-2A
DM-C10 DM-C12 DM-C14 DM-C16: library part CMP-1036-04427-2, Manufacturer="AVX Interconnect / Elco", Part Number=08051C104JAT2A
DM-C11: library part CMP-1665-00017-3, "Aluminum Electrolytic Capacitor, 220 uF, +/- 20%, 25 V, -55 to 105 degC, 2-Pin CAPAE, RoHS, Tape and Reel", Manufacturer=Panasonic, Max Operating Temperature="105 degC", Min Operating Temperature="-55 degC", Package Quantity=500, Voltage Rating="25 V", ComponentLink1Description="Manufacturer URL", ComponentLink1URL=http://www.panasonic.com/, ComponentLink2Description=Datasheet, ComponentLink2URL=http://industrial.panasonic.com/cdbs/www-data/pdf/RDE0000/ABA0000C1181.pdf, DatasheetVersion=03/2016, Height="10.2 mm", Lead Pitch="3.1 mm", Length="10.2 mm", Mount="Surface Mount", Mounting Technology="Surface Mount", PackageDescription="2-Pin Electrolytic Aluminum Capacitor, Body 8.3 x 8.3 mm", PackageReference=EEE-FK1E221P, Packaging="Tape and Reel", Pins=2, REACH SVHC="No SVHC", RoHSCompliant=true
DM-C13 DM-C15 DM-C17: library part CMP-2000-06213-1, "Aluminum Electrolytic Capacitor, 22 uF, +/- 20%, 25 V, 2-Pin SMD (Size Code C), -55 to 105 degC, RoHS, Tape and Reel", Capacitance=22µF, Case Size/Dimension=Ø5x5.8mm, ESR (Equivalent Series Resistance)=0.36O, Lifetime@Temperature=2000Hrs@105°C, Manufacturer=Panasonic, Operating Temp Range=-55to+105°C, Operating Temp-Max=105°C, Package Description="2-Pin Electrolytic Aluminum Capacitor, Body 5.3 x 5.3 mm", Package Reference=FP-V-C, Rated Voltage=25V, Ripple Current=240mA, Datasheet URL=http://industrial.panasonic.com/cdbs/www-data/pdf/RDE0000/ABA0000C1184.pdf, Datasheet Version=03/2016, Manufacturer URL=http://www.panasonic.com/, Mounting Technology=SurfaceMount, Package URL=http://industrial.panasonic.com/cdbs/www-data/pdf/RDE0000/DME0000COL48.pdf, Series=FP, Type=Can
DM-D1 DM-D2 DM-D3 DM-D4: library part CMP-0931-00033-1, "Small Signal Zener Diode, 15 V +/- 5%, -55 to 155 degC, 2-Pin SOD-123, RoHS, Tape and Reel", Manufacturer="Vishay Semiconductor", Operating Temperature="-55 to 150 degC", Power Dissipation (mW)=500, Test Current (IZT1) (mA)=8.5, Tolerance="+/- 5%", Zener Voltage (NOM.) (V)=15, ComponentLink1Description="Manufacturer URL", ComponentLink1URL=http://www.vishay.com/, ComponentLink2Description=Datasheet, ComponentLink2URL=http://www.vishay.com/docs/85774/mmsz5225.pdf, ComponentLink3Description="Package Specification", ComponentLink3URL=http://www.vishay.com/docs/85774/mmsz5225.pdf, DatasheetVersion="Rev. 1.9", Int. Construction=Single, Mounting Technology="Surface Mount", PackageDescription="2-Pin SMD, Body 2.7 x 1.55 mm, Height 1.35 mm", PackageReference=SOD-123-2, PackageVersion="Rev. 1.9", Packing="Tape and Reel", PartNumber=MMSZ5245B-E3-08, RoHS=TRUE, Zener Impedance (IZT1) (Max.) (Ohm)=16
DM-R1 DM-R2 DM-R3 DM-R6 DM-R7 DM-R8: library part CMP-2001-00580-1, "100 ohm resistor", Manufacturer=Panasonic, Part Number=ERA6AEB101V
DM-R4: library part CMP-2001-00550-5, "Chip Resistor, 4.7 KOhm, +/- 1%, 0.125 W, -55 to 155 degC, 0805 (2012 Metric), RoHS, Tape and Reel", Manufacturer=Panasonic, Max Operating Temperature="155 degC", Min Operating Temperature="-55 degC", Package Quantity=5000, Voltage Rating="150 V", ComponentLink1Description="Manufacturer URL", ComponentLink1URL=http://www.panasonic.com/, ComponentLink2Description=Datasheet, ComponentLink2URL=http://industrial.panasonic.com/cdbs/www-data/pdf/RDA0000/AOA0000C86.pdf, DatasheetVersion=04/2015, Height="0.6 mm", Length="2 mm", Mount="Surface Mount", Mounting Technology="Surface Mount", PackageDescription="2-Pin Surface Mount Device, Body 2 x 1.25 mm", PackageReference=0805, Packaging="Tape and Reel", Pins=2, REACH SVHC=Yes, RoHSCompliant=true
DM-R5: library part CMP-2001-00580-1, Manufacturer=Panasonic, Part Number=ERA6AEB101V
DM-R9: library part CMP-2001-03663-1, "200 ohm resistor", Manufacturer="Vishay Dale", Part Number=CRCW0805200RFKEA
DM-R10: "Resistor", Manufacturer_Name=Vishay, Mouser Part Number=71-WSHM2818R0330FEB, Datasheet Link=https://componentsearchengine.com/Datasheets/2/WSHM2818R0330FEB.pdf, Height=1.75mm, Manufacturer_Part_Number=WSHM2818R0330FEB, Mouser Price/Stock=https://www.mouser.co.uk/ProductDetail/Vishay-Dale/WSHM2818R0330FEB?qs=Blj4iBE%2FJuORIC0JacTR6A%3D%3D
DM-U1: "3 phase power module"
J0 J2: "Connector", Manufacturer_Name="Phoenix Contact", Datasheet Link=https://www.digikey.com/en/products/detail/phoenix-contact/1985881/2511015, Height=13.9mm, Manufacturer_Part_Number=1985881
J1: "Connector", Manufacturer_Name="Phoenix Contact", Mouser Part Number=651-1985917, Arrow Part Number=1985917, Arrow Price/Stock=https://www.arrow.com/en/products/1985917/phoenix-contact, Datasheet Link=https://media.digikey.com/pdf/Data%20Sheets/Phoenix%20Contact%20PDFs/Multi-Postion%20PCTerminal%20Blocks.pdf, Height=13.95mm, Manufacturer_Part_Number=1985917, Mouser Price/Stock=https://www.mouser.co.uk/ProductDetail/Phoenix-Contact/1985917/?qs=ibOxrZ%2Fd8eDdpJplVMXgvQ%3D%3D
J3: "Connector", Manufacturer_Name="Phoenix Contact", Mouser Part Number=651-1730515, Arrow Part Number=1730515, Arrow Price/Stock=https://www.arrow.com/en/products/1730515/phoenix-contact, Datasheet Link=https://media.digikey.com/PDF/Data%20Sheets/Phoenix%20Contact%20PDFs/1730515.pdf, Height=18mm, Manufacturer_Part_Number=1730515, Mouser Price/Stock=https://www.mouser.com/Search/Refine.aspx?Keyword=651-1730515
J4: "Connector", Manufacturer_Name="Phoenix Contact", Mouser Part Number=651-1733606, Arrow Part Number=1733606, Arrow Price/Stock=https://www.arrow.com/en/products/1733606/phoenix-contact, Datasheet Link=https://www.phoenixcontact.com/online/portal/us?uri=pxc-oc-itemdetail:pid=1733606&library=usen&tab=1, Height=15.45mm, Manufacturer_Part_Number=1733606, Mouser Price/Stock=https://www.mouser.co.uk/ProductDetail/Phoenix-Contact/1733606/?qs=coeDwHeOZKnxpzvXWWKBZQ%3D%3D
MAIN-R1 MAIN-R2 MAIN-R3: library part CMP-2001-04472-1, Manufacturer="Vishay Dale", Part Number=CRCW080510K0FKEAHP
PS-C1: "Capacitor Polarised 47uF", Manufacturer_Name=Panasonic, Mouser Part Number=667-EEU-FS2A470, Arrow Part Number=EEU-FS2A470, Arrow Price/Stock=https://www.arrow.com/en/products/eeu-fs2a470/panasonic, Datasheet Link=https://componentsearchengine.com/Datasheets/1/EEU-FS2A470.pdf, Height=16.5mm, Manufacturer_Part_Number=EEU-FS2A470, Mouser Price/Stock=https://www.mouser.co.uk/ProductDetail/Panasonic/EEU-FS2A470?qs=w%2Fv1CP2dgqrDlaRaE647gA%3D%3D
PS-D1: "Diode", Manufacturer_Name=LITTELFUSE, Mouser Part Number=576-SMBJ28A, Arrow Part Number=SMBJ28A, Arrow Price/Stock=https://www.arrow.com/en/products/smbj28a/littelfuse, Datasheet Link=https://componentsearchengine.com/Datasheets/2/SMBJ28A.pdf, Height=2.61mm, Manufacturer_Part_Number=SMBJ28A, Mouser Price/Stock=https://www.mouser.co.uk/ProductDetail/Littelfuse/SMBJ28A?qs=JJML70Qc14vmSTVTa1LvqQ%3D%3D
PS-D2: "TVS Diode (Bi-directional)", Manufacturer_Name=Panasonic, Mouser Part Number=667-EZA-EG2A50AX, Arrow Part Number=EZA-EG2A50AX, Arrow Price/Stock=https://www.arrow.com/en/products/eza-eg2a50ax/panasonic, Datasheet Link=https://industrial.panasonic.com/cdbs/www-data/pdf/AWD0000/AWD0000C23.pdf, Height=0.43mm, Manufacturer_Part_Number=EZA-EG2A50AX, Mouser Price/Stock=https://www.mouser.co.uk/ProductDetail/Panasonic/EZA-EG2A50AX?qs=WwqriLBepZuVGjkTEFYPQg%3D%3D
PS-FH1: "Undefined or Miscellaneous", Manufacturer_Name=LITTELFUSE, Mouser Part Number=576-0PTF0078P, Arrow Part Number=0PTF0078P, Arrow Price/Stock=https://www.arrow.com/en/products/0ptf0078p/littelfuse, Datasheet Link=https://media.digikey.com/pdf/Data%20Sheets/Littelfuse%20PDFs/PTF075_77_78.pdf, Height=11.5mm, Manufacturer_Part_Number=0PTF0078P, Mouser Price/Stock=https://www.mouser.co.uk/ProductDetail/Littelfuse/0PTF0078P?qs=Co4VkB5J4%2Fsczy6gG8s%2FsA%3D%3D
PS-PS1: "Power Supply", Manufacturer_Name="RECOM Power", Mouser Part Number=919-RS3-243.3S, Arrow Part Number=RS3-243.3S, Arrow Price/Stock=https://www.arrow.com/en/products/rs3-243.3s/recom-power, Datasheet Link=https://www.arrow.com/en/products/rs3-243.3s/recom-power, Height=11.35mm, Manufacturer_Part_Number=RS3-243.3S, Mouser Price/Stock=https://www.mouser.com/Search/Refine.aspx?Keyword=919-RS3-243.3S
PS-PS2: "Power Supply 12V", Manufacturer_Name="RECOM Power", Mouser Part Number=919-RS3-2412S, RS Part Number=1669097, Datasheet Link=https://www.recom-power.com/pdf/Econoline/RS3-S_D_Z.pdf, Manufacturer_Part_Number=RS3-2412S, Mouser Price/Stock=https://www.mouser.com/Search/Refine.aspx?Keyword=919-RS3-2412S, RS Price/Stock=https://uk.rs-online.com/web/p/products/1669097
PS-PS3: "Power Supply", Manufacturer_Name="RECOM Power", Mouser Part Number=919-RS3-2415S, Datasheet Link=https://www.recom-power.com/pdf/Econoline/RS3-S_D_Z.pdf, Height=11.35mm, Manufacturer_Part_Number=RS3-2415S, Mouser Price/Stock=https://www.mouser.com/Search/Refine.aspx?Keyword=919-RS3-2415S
PS-R1: library part CMP-1013-00770-2, Manufacturer="Vishay Dale", Part Number=CRCW0805210KFKEA
PS-R2: library part CMP-2001-00599-1, Manufacturer=Panasonic, Part Number=ERA6AEB154V
SH-C1 SH-C2: library part CMP-2007-00279-2, "CAP CER 0.1UF 50V X7R 0805", Capacitance="0.10 μF", Manufacturer=KEMET, Package=C0805C-DN, Temperature="-55°C to +125°C", Temperature Characteristic=X7R, Temperature Coefficient=30ppm/°C, Temperature Range High=+125°C, Temperature Range Low=-55°C, Tolerance=0.1, Voltage Rating="50 V", Automotive=No, Category=Cap, ComponentLink2Description=Datasheet, ComponentLink2URL=https://content.kemet.com/datasheets/KEM_C1003_C0G_SMD.pdf, Device Class L1="Passive Components", Device Class L2=Capacitors, Device Class L3="Ceramic Capacitors", Digikey Description="CAP CER 0.1UF 50V X7R 0805", Height=0.88mm, Ipc Land Pattern Name=CAPC200125X78, Lead Free=Yes, Manufacturer Part Number=C0805C104K5RACTU, Material=Ceramic, Mouser Description="Cap Ceramic 0.1uF 50V X7R 10% SMD 2.0 x 1.2 mm 125 C Paper T/R", Octopart=https://octopart.com/c0805c104k5ractu-kemet-143926, RoHS=TRUE
SH-C3 SH-C4: library part CMP-1036-02979-2, Manufacturer="AVX Interconnect / Elco", Part Number=08055C102KAT2A.
SH-IC1 SH-IC2: "12A current sensing Integrated Circuit", Manufacturer_Name="Allegro Microsystems", Arrow Part Number=ACS711ELCTR-12AB-T, Arrow Price/Stock=https://www.arrow.com/en/products/acs711elctr-12ab-t/allegro-microsystems, Datasheet Link=https://www.allegromicro.com/~/media/Files/Datasheets/ACS711-Datasheet.ashx, Height=1.75mm, Manufacturer_Part_Number=ACS711ELCTR-12AB-T
SH-IC3: "OP-AMP voltage follower Integrated Circuit", Arrow Part Number=LMC6482IN/NOPB, Manufacturer_Name="Texas Instruments", Mouser Part Number=926-LMC6482IN/NOPB, Arrow Price/Stock=https://www.arrow.com/en/products/lmc6482innopb/texas-instruments, Datasheet Link=http://www.ti.com/lit/gpn/lmc6482, Height=5.08mm, Manufacturer_Part_Number=LMC6482IN/NOPB, Mouser Price/Stock=https://www.mouser.co.uk/ProductDetail/Texas-Instruments/LMC6482IN-NOPB?qs=QbsRYf82W3EByDDrj8Vijg%3D%3D
SH-R1 SH-R2 SV-R5: library part CMP-1013-00510-2, Manufacturer="Vishay Dale", Part Number=CRCW08051K00FKEA
SP-IC: "Integrated Circuit", Manufacturer_Name="Texas Instruments", Mouser Part Number=595-SN74LVC245ADGVR, Arrow Part Number=SN74LVC245ADGVR, Arrow Price/Stock=https://www.arrow.com/en/products/sn74lvc245adgvr/texas-instruments, Datasheet Link=http://www.ti.com/lit/gpn/sn74lvc245a, Height=1.2mm, Manufacturer_Part_Number=SN74LVC245ADGVR, Mouser Price/Stock=https://www.mouser.co.uk/ProductDetail/Texas-Instruments/SN74LVC245ADGVR?qs=OorDGPQ79ErH2VKzCctyvg%3D%3D
SV-C1: library part CMP-2007-04584-1, Manufacturer="AVX Interconnect / Elco", Part Number=08052A151JAT2A
SV-C2: library part CMP-03020-014281-1, "CAP CER 100PF 100V C0G/NP0 0805", Capacitance="100 pF", Manufacturer=KEMET, Package=C0805C-DN, Temperature="-55°C to +125°C", Temperature Characteristic=C0G, Temperature Coefficient=30ppm/°C, Temperature Range High=+125°C, Temperature Range Low=-55°C, Tolerance=0.05, Voltage Rating="100 V", Automotive=No, Category=Cap, ComponentLink2Description=Datasheet, ComponentLink2URL=https://content.kemet.com/datasheets/KEM_C1003_C0G_SMD.pdf, Device Class L1="Passive Components", Device Class L2=Capacitors, Device Class L3="Ceramic Capacitors", Digikey Description="CAP CER 100PF 100V C0G/NP0 0805", Height=0.88mm, Ipc Land Pattern Name=CAPC200125X78, Lead Free=Yes, Manufacturer Part Number=C0805C101J1GACTU, Material=Ceramic, Mouser Description="Multilayer Ceramic Capacitors MLCC - SMD/SMT 100volts 100pF C0G 5%", Octopart=https://octopart.com/c0805c101j1gactu-kemet-123666, RoHS=TRUE
SV-IC1: "Integrated Circuit", Arrow Part Number=LMC6482IN/NOPB, Manufacturer_Name="Texas Instruments", Mouser Part Number=926-LMC6482IN/NOPB, Arrow Price/Stock=https://www.arrow.com/en/products/lmc6482innopb/texas-instruments, Datasheet Link=http://www.ti.com/lit/gpn/lmc6482, Height=5.08mm, Manufacturer_Part_Number=LMC6482IN/NOPB, Mouser Price/Stock=https://www.mouser.co.uk/ProductDetail/Texas-Instruments/LMC6482IN-NOPB?qs=QbsRYf82W3EByDDrj8Vijg%3D%3D
SV-IC2: "Integrated Circuit", Manufacturer_Name="Allegro Microsystems", Arrow Part Number=ACS711ELCTR-12AB-T, Arrow Price/Stock=https://www.arrow.com/en/products/acs711elctr-12ab-t/allegro-microsystems, Datasheet Link=https://www.allegromicro.com/~/media/Files/Datasheets/ACS711-Datasheet.ashx, Height=1.75mm, Manufacturer_Part_Number=ACS711ELCTR-12AB-T
SV-R1: library part CMP-2001-00038-1, Manufacturer=Panasonic, Part Number=ERJ-6ENF2103V
SV-R2: library part CMP-1013-00668-2, Manufacturer=Panasonic, Part Number=ERJ-6ENF2612V
SV-R3: library part CMP-2001-00119-1, Manufacturer=Panasonic, Part Number=ERJ-6ENF3093V
SV-R4: library part CMP-2001-00606-1, Manufacturer=Panasonic, Part Number=ERA6AEB183V
TI-U1: "F280049C", Parameter 1="test 2"

## Free pads (board coordinates)
  round 60 hole 167 unplated: M1(175,175) M2(175,4825) M3(5825,4825) M4(5800,175)

## Via types
v1: diameter 50, hole 28, Power Layer to Extra signal layer, 69 vias
v2: diameter 50/50/50/50 (per signal layer), hole 28, Power Layer to Extra signal layer, 1 vias

## Nets (pads, with @x,y where several pads share a name; then routed paths per layer and width w, separated by ;. In a path a pad name is that pad's centre, name@x,y a point inside that pad or via, vN(x,y) a via of type N, cw(c..) or ccw(c..) an arc to the next point about the centre after c; other vN are vias at no path point)
"24V After Fuse": PS-C1.1 PS-D1.1 PS-D2.1 PS-FH1.2 PS-PS1.2 PS-PS2.2 PS-PS3.2 SV-IC2.1 SV-IC2.2 SV-R1.2 | length 5350.3
  Power Layer w10: PS-PS3.2 PS-PS3.2@565,1435 ; PS-PS2.2 PS-PS2.2@563.1,1843.1 ; PS-PS1.2@565,1065 PS-PS1.2 ; PS-D2.1 PS-D2.1@622.5,3157.5 ; SV-IC2.2@622.5,2919.27 SV-IC2.2
  Power Layer w30: v1(100,2230) 203.45,2126.55 806.55,2126.55
  Power Layer w40: v1(980,2370) 1050,2370
  Power Layer w60: PS-PS2.2@563.1,1843.1 563.1,1883.1
  Power Layer w80: PS-PS3.2 PS-PS2.2 ; 563.1,1883.1 806.55,2126.55 1050,2370 1050,3250 860,3440 556.77,3440 ; PS-PS1.2@565,1065 PS-PS3.2@565,1435 ; 600,2910 600,3150 556.77,3193.23 PS-D1.1 556.77,3440 ; PS-FH1.2 640,3760.24 PS-C1.1 556.77,3526.77 556.77,3440
  Extra signal layer w35: v1(980,2370) 1285.55,2064.45 SV-R1.2
"24V to Follower": SV-C1.2 SV-IC1.3 SV-R1.1 SV-R2.2 | length 268.5
  Extra signal layer w10: SV-R1.1 SV-R2.2 1478.82,1995.55 1494.37,1980 SV-IC1.3 1532.83,2009.13 SV-C1.2
24V-To-Boost: BS-L1.1 BS-L1.2 BS-L1.3 BS-L1.4 BS-L1.5 BS-L1.6 BS-L1.7 BS-L1.8 BS-L1.9 SV-IC2.3 SV-IC2.4 | length 3207.6
  Power Layer w60: SV-IC2.3 SV-IC2.4
  Power Layer w80: BS-L1.1 BS-L1.2 BS-L1.3 BS-L1.4 BS-L1.5 BS-L1.6 BS-L1.7 BS-L1.8 BS-L1.9 320,2550 400,2470 500,2370 830,2370 940,2480 940,2790 813.23,2916.77 SV-IC2.4
"48V to Follower": SV-C2.1 SV-IC1.5 SV-R3.1 SV-R4.2 | length 244.9
  Extra signal layer w10: SV-C2.1 1720,2159.06 SV-R4.2 SV-R3.1 1816.3,2153.7 SV-IC1.5
+3.3: J1.1 PS-PS1.6 SH-C1.1 SH-C2.1 SH-IC1.8 SH-IC2.8 SH-IC3.8 SH-R1.1 SH-R2.1 SP-IC.1 SP-IC.20 SV-C3.2 SV-IC1.8 SV-IC2.8 SV-R5.2 TI-U1.1 TI-U1.41 | length 3752
  Power Layer w10: SV-IC2.8 571.77,2700 v1(500,2700) 500,2645.04 597.17,2547.87 SV-R5.2 ; SH-R2.1 4124.14,4710 4139.81,4694.33 4139.81,4680.19 4165,4655 SH-IC2.8 4280,4651.77 4280,4627.2 4317.2,4590 v1(4325,4590) ; SH-R1.1 5420,4487.87 5465,4532.87 SH-IC1.8 5468.23,4630 v1(5520,4630)
  Signal layer w10: 740,1920 750,1910
  Signal layer w30: v1(110,1920) 740,1920 ; v1(500,2700) 500,2540 750,2290 750,1910 750,1280 PS-PS1.6
  Extra signal layer w10: v1(500,2700) 507.65,2707.65 519.62,2707.65 620,2808.03 SV-C3.2 ; v1(4325,4590) 4325,4595 4358.43,4628.43 4358.43,4686.3 4372.13,4700 SH-C2.1 ; SH-C1.1 5419.06,4732.13 5432.76,4718.43 5481.57,4718.43 5520,4680 v1(5520,4630)
  other v1: 5840,4540 5950,4540 5840,4660 5950,4660
+5: J4.1 MAIN-R1.2 MAIN-R2.2 MAIN-R3.2 PS-R1.1 PS-R2.2 | length 2670.8
  Power Layer w10: 180,860 190,850 ; PS-R2.2 PS-R2.2@196.89,639.53 ; MAIN-R2.2@750,694.45 MAIN-R2.2 MAIN-R2.2@770,694.45
  Power Layer w20: v1(90,860) 180,860 ; PS-R2.2 190,850 PS-R1.1 ; MAIN-R2.2@750,694.45 MAIN-R3.2 251.81,694.45 196.89,639.53 240.47,639.53 520,360 1070,360 J4.1 ; MAIN-R2.2@770,694.45 MAIN-R1.2
+12: BS-C1.2 BS-IC1.5 BS-Rboot.2 PS-PS2.6 PS-R1.2 | length 1348.8
  Power Layer w10: PS-R1.2 v1(190,1260)
  Extra signal layer w10: BS-C1.2 2830,4950 BS-Rboot.2 ; BS-IC1.5 3130,3998.23 v1(3130,4060)
  Extra signal layer w20: v1(190,1260) 570,1640 760,1640 PS-PS2.6
  other v1: 1550,4950
+15: DM-C10.2 DM-C11.1 DM-D4.2 DM-R4.1 DM-U1.1 DM-U1.10 DM-U1.14 DM-U1.18 PS-PS3.6 | length 1743.7
  Extra signal layer w10: DM-R4.1 4275.91,2220 4615.91,2560 DM-C11.1 4910,2601.34 4946.34,2637.68 5045.67,2637.68 5145.16,2737.17 DM-C10.2 5542.83,2737.17 DM-D4.2 5682.48,2700 5727.48,2745 DM-U1.1
  other v1: 2160,2950
+48: BS-C2.2 BS-C3.1 BS-C4.1 BS-C5.1 BS-C7.2 BS-C8.2 BS-CR.1 BS-MOS1.2 BS-RV.1 DM-C19.1 DM-U1.27 J2.1 SV-R3.2 | length 2286.4
  Signal layer w30: v1(2130,2450) 2620,2940 BS-C4.1
  Extra signal layer w10: SV-R3.2 1878.9,2198.9 ; v1(3550,4370) v1@3557.17,4370 ; BS-C8.2 3625.2,4311.97 3574.82,4362.35 3564.82,4362.35 v1@3557.17,4370 ; BS-C7.2 3625.2,4438.03 v1@3557.17,4370
  Extra signal layer w35: 1878.9,2198.9 v1(2130,2450)
A-IN-BOT: DM-C1.2 DM-R1.2 DM-U1.3 | length 3522.9
  Signal layer w10: v1(5400,790) 5670,1060 ; v1(5650,1120) 5650,1080 5670,1060 ; v1(5940,2880) 5940,1330 5670,1060
  Extra signal layer w10: DM-R1.2 DM-C1.2 ; v1(5650,1120) 5650,735.91 5776.72,609.19 5800.81,609.19 v1(5930,480) ; DM-U1.3 5743.76,2882.5 5937.5,2882.5 v1(5940,2880)
A-IN-TOP: DM-C7.2 DM-R6.2 DM-U1.9 | length 3948.3
  Signal layer w10: v1(5500,790) 5530,820 ; v1(5930,370) 5930,380 5550,760 5550,800 5530,820 ; v1(5940,3370) 5950.82,3370 5970.32,3350.5 5972.93,3350.5 5980,3343.43 5980,1270 5530,820
  Extra signal layer w10: DM-R6.2 v1(5500,790) DM-C7.2 ; DM-U1.9 5582.34,3372.5 5937.5,3372.5 v1(5940,3370)
A-To-Hall: DM-U1.24 SH-IC1.1 SH-IC1.2 | length 2394.6
  Power Layer w10: SH-IC1.1 5465,4829.55 SH-IC1.1@5472.8,4821.75
  Power Layer w40: SH-IC1.2 5415,4915 ; SH-IC1.1@5472.8,4821.75 5504.69,4821.75
  Power Layer w60: DM-U1.24 5600,4508.74 5600,4726.44 ; 5415,4915 5447.22,4947.22 5492.78,4947.22 5600,4840 5600,4726.44 ; 5504.69,4821.75 5600,4726.44
A-To-Motor: J3.1 J3.2 SH-IC1.3 SH-IC1.4 | length 646.7
  Power Layer w10: J3.2 J3.2@5111.79,4581.79 ; SH-IC1.4@5315,4829.55 SH-IC1.4 ; SH-IC1.3@5357.2,4867.24 5365,4859.45 SH-IC1.3
  Power Layer w60: J3.1 5315,4867.24 SH-IC1.3@5357.2,4867.24
  Power Layer w80: J3.2@5111.79,4581.79 5111.79,4626.34 SH-IC1.4@5315,4829.55
"Analog 24V- To-TI": SV-IC1.1 SV-IC1.2 TI-U1.67 | length 1240
  Signal layer w10: SV-IC1.2 SV-IC1.1 1503.7,1696.3 1550,1650 2060,1650 TI-U1.67
"Analog 48V- To-TI": SV-IC1.6 SV-IC1.7 TI-U1.66 | length 829.3
  Extra signal layer w10: SV-IC1.6 SV-IC1.7 2390,1880 TI-U1.66
"Analog A- To-TI": SH-C3.2 SH-IC1.7 TI-U1.23 | length 4268.6
  Power Layer w10: v1(5410,4560) 5412.5,4562.5 5412.5,4630.73 SH-IC1.7
  Signal layer w10: TI-U1.23 5300,1850 5380,1770 5500,1770 5621.17,1891.17 v1(5730,2000)
  Extra signal layer w10: v1(5410,4560) 5410,4482.83 SH-C3.2 5600,4480 ; v1(5613.2,4918.93) 5620,4912.14 5620,4500 5600,4480 ; v1(5730,2000) 5740,2000 5980,2240 5980,4150.73 5650.73,4480 5600,4480
"Analog C- To-TI": SH-C4.2 SH-IC2.7 TI-U1.24 | length 4926
  Power Layer w10: v1(4200,4710) 4202.5,4707.5 4280.73,4707.5 SH-IC2.7
  Signal layer w10: v1(3850,2350) 3850,1840 4090,1600 5040,1600 5200,1760 TI-U1.24
  Extra signal layer w10: v1(3850,2350) 3850,2470 3970,2590 3970,4480 v1(4200,4710) SH-C4.2
"Analog IL- To-TI": SV-IC2.7 TI-U1.48 | length 1984.8
  Power Layer w10: v1(620,2620) 622.5,2622.5 622.5,2700.73 SV-IC2.7
  Signal layer w20: v1(620,2620) 1770,2620 TI-U1.48
B-IN-BOT: DM-C2.2 DM-R2.2 DM-U1.4 | length 3819.6
  Signal layer w10: v1(4990,790) 5700,1500 ; v1(5660,1540) 5700,1500 ; v1(5860,2950) 5860,1660 5700,1500
  Extra signal layer w10: DM-R2.2 v1(4990,790) DM-C2.2 ; v1(5660,1540) 5660,1390 5750,1300 5750,880 v1(5930,700) ; DM-U1.4 5743.76,2952.5 5857.5,2952.5 v1(5860,2950)
B-IN-TOP: DM-C8.2 DM-R7.2 DM-U1.13 | length 4623.7
  Signal layer w10: v1(5100,780) 5640,1320 ; v1(5700,1270) 5650,1320 5640,1320 ; v1(5900,3720) 5900,1580 5640,1320
  Extra signal layer w10: DM-C8.2 v1(5100,780) 5100,710 DM-R7.2 ; DM-U1.13 5582.34,3722.5 5897.5,3722.5 v1(5900,3720) ; v1(5700,1270) 5700,820 v1(5930,590)
B-To-Motor: DM-U1.25 J3.3 J3.4 | length 1942.8
  Power Layer w60: DM-U1.25 4790,3998.74 ; J3.4 4900,4108.74 4790,3998.74 ; J3.3 4790,4757.24 4790,3998.74
Boostrap-A: DM-C16.2 DM-C17.1 DM-D1.2 DM-U1.12 | length 856.4
  Extra signal layer w10: DM-C17.1 5157.13,3659.29 DM-C16.2 5225.47,3641.89 DM-D1.2 5411.73,3630.16 5557.69,3630.16 5562.5,3625.35 DM-U1.12
Boostrap-B: DM-C14.2 DM-C15.1 DM-D2.2 DM-U1.16 | length 855
  Extra signal layer w10: DM-C15.1 5158.19,4014.65 DM-C14.2 5243.11,3995.94 DM-D2.2 5401.73,3984.21 5550.67,3984.21 5559.52,3975.35 DM-U1.16
Boostrap-C: DM-C12.2 DM-C13.1 DM-D3.2 DM-U1.20 | length 857
  Extra signal layer w10: DM-C13.1 4940,4351.02 4971.02,4320 DM-C12.2 5245.94,4345.94 DM-D3.2 5411.73,4334.21 5555.67,4334.21 5564.52,4325.35 DM-U1.20
C-IN-BOT: DM-C3.2 DM-R3.2 DM-U1.5 | length 4308.5
  Signal layer w10: v1(4580,770) 5360,1550 ; v1(5320,1590) 5360,1550 ; DM-U1.5 5755.04,3025 5800,2980.04 5800,1990 5360,1550
  Extra signal layer w10: DM-C3.2 v1(4580,770) 4580,684.8 DM-R3.2 ; v1(5320,1590) 5470,1590 5585.86,1705.86 5594.14,1705.86 5640,1660 5730,1660 5750,1640 5750,1470 5836.17,1383.83 5836.17,1043.83 v1(5930,950)
C-IN-TOP: DM-C9.2 DM-R8.2 DM-U1.17 | length 5185.3
  Signal layer w10: v1(4690,770) 5580,1660 ; DM-U1.17 5775,4075 5820,4030 5820,1900 5580,1660 ; v1(5610,1620) 5580,1650 5580,1660
  Extra signal layer w10: DM-R8.2 v1(4690,770) DM-C9.2 ; v1(5610,1620) 5640,1590 5704.14,1590 5710,1584.14 5710,1420 5800,1330 5800,950 5920,830 v1(5930,830)
C-To-Hall: DM-U1.26 SH-IC2.1 SH-IC2.2 | length 1004.6
  Power Layer w10: SH-IC2.1 SH-IC2.1@4514,4655 ; SH-IC2.2 SH-IC2.2@4514,4705
  Power Layer w30: SH-IC2.2@4514,4705 4600,4619
  Power Layer w40: DM-U1.26 4700,4208.74 4700,4380 4600,4480 4600,4619 4550,4619 SH-IC2.1@4514,4655
  Power Layer w60: DM-U1.26 DM-U1.26@4498.74,4018.74
C-To-Motor: J3.5 J3.6 SH-IC2.3 SH-IC2.4 | length 568.9
  Power Layer w10: J3.6 J3.6@4700,4601.77
  Power Layer w60: SH-IC2.3 4587.76,4755 J3.5 ; SH-IC2.4 4567.26,4734.51 J3.6@4700,4601.77
GND: BS-C1.1 BS-C2.1 BS-C3.2 BS-C4.2 BS-C5.2 BS-C7.1 BS-C8.1 BS-CR.2 BS-H1.1 BS-H1.2 BS-H1.3 BS-H1.4 BS-IC1.3 BS-MOS2.3 BS-R8.1 BS-RV.2 DM-C1.1 DM-C2.1 DM-C3.1 DM-C4.1 DM-C5.1 DM-C6.1 DM-C7.1 DM-C8.1 DM-C9.1 DM-C10.1 DM-C11.2 DM-C18.1 DM-C19.2 DM-D4.1 DM-R10.2 DM-U1.2 J0.2 J1.3 J2.2 J4.5 PS-C1.2 PS-D1.2 PS-D2.2 PS-PS1.1 PS-PS1.7 PS-PS2.1 PS-PS2.7 PS-PS3.1 PS-PS3.7 PS-R2.1 SH-C1.2 SH-C2.2 SH-C3.1 SH-C4.1 SH-IC1.5 SH-IC2.5 SH-IC3.4 SP-IC.10 SV-C1.1 SV-C2.2 SV-C3.1 SV-IC1.4 SV-IC2.5 SV-R2.1 SV-R4.1 TI-U1.20 TI-U1.22 TI-U1.60 TI-U1.62 | length 6590.4
  Power Layer w10: PS-D2.2 668.31,3165 725,3165 v1(730,3170) PS-D1.2 PS-D1.2@729.02,3290 ; SV-IC2.5 728.23,2700 v1(800,2700) ; v1(1100,720) 1100,712.09 1124.33,687.76 SP-IC.10 ; DM-C18.1 4070,2968.19 DM-R10.2 DM-R10.2@4078.19,2940 ; SH-IC2.5 4290,4811.77 v1(4290,4870) ; v1(4370,4020) DM-C19.2 ; v1(5260,4630) 5311.77,4630 SH-IC1.5
  Power Layer w20: PS-R2.1 190,440 J4.5
  Power Layer w40: BS-C4.2 DM-R10.2@4078.19,2940
  Signal layer w10: TI-U1.60 J1.3